# Altium PCB 110-00315-D_B1-DevKit.PcbDoc (part 1 of 9)
Units mil, origin at the board's own origin, x right, y up, seen from the top; angles counter-clockwise.
Board outline 5199.57 x 2702 mil, 8 copper layers (Top Layer, Layer 2-GND-Plane, Layer 3, Layer 4, Layer 5, Layer 6, Layer 7-PWR-Plane, Bottom Layer), stack 60.866 mil thick; 418 components, 298 nets, 1591 pads, 1631 vias.
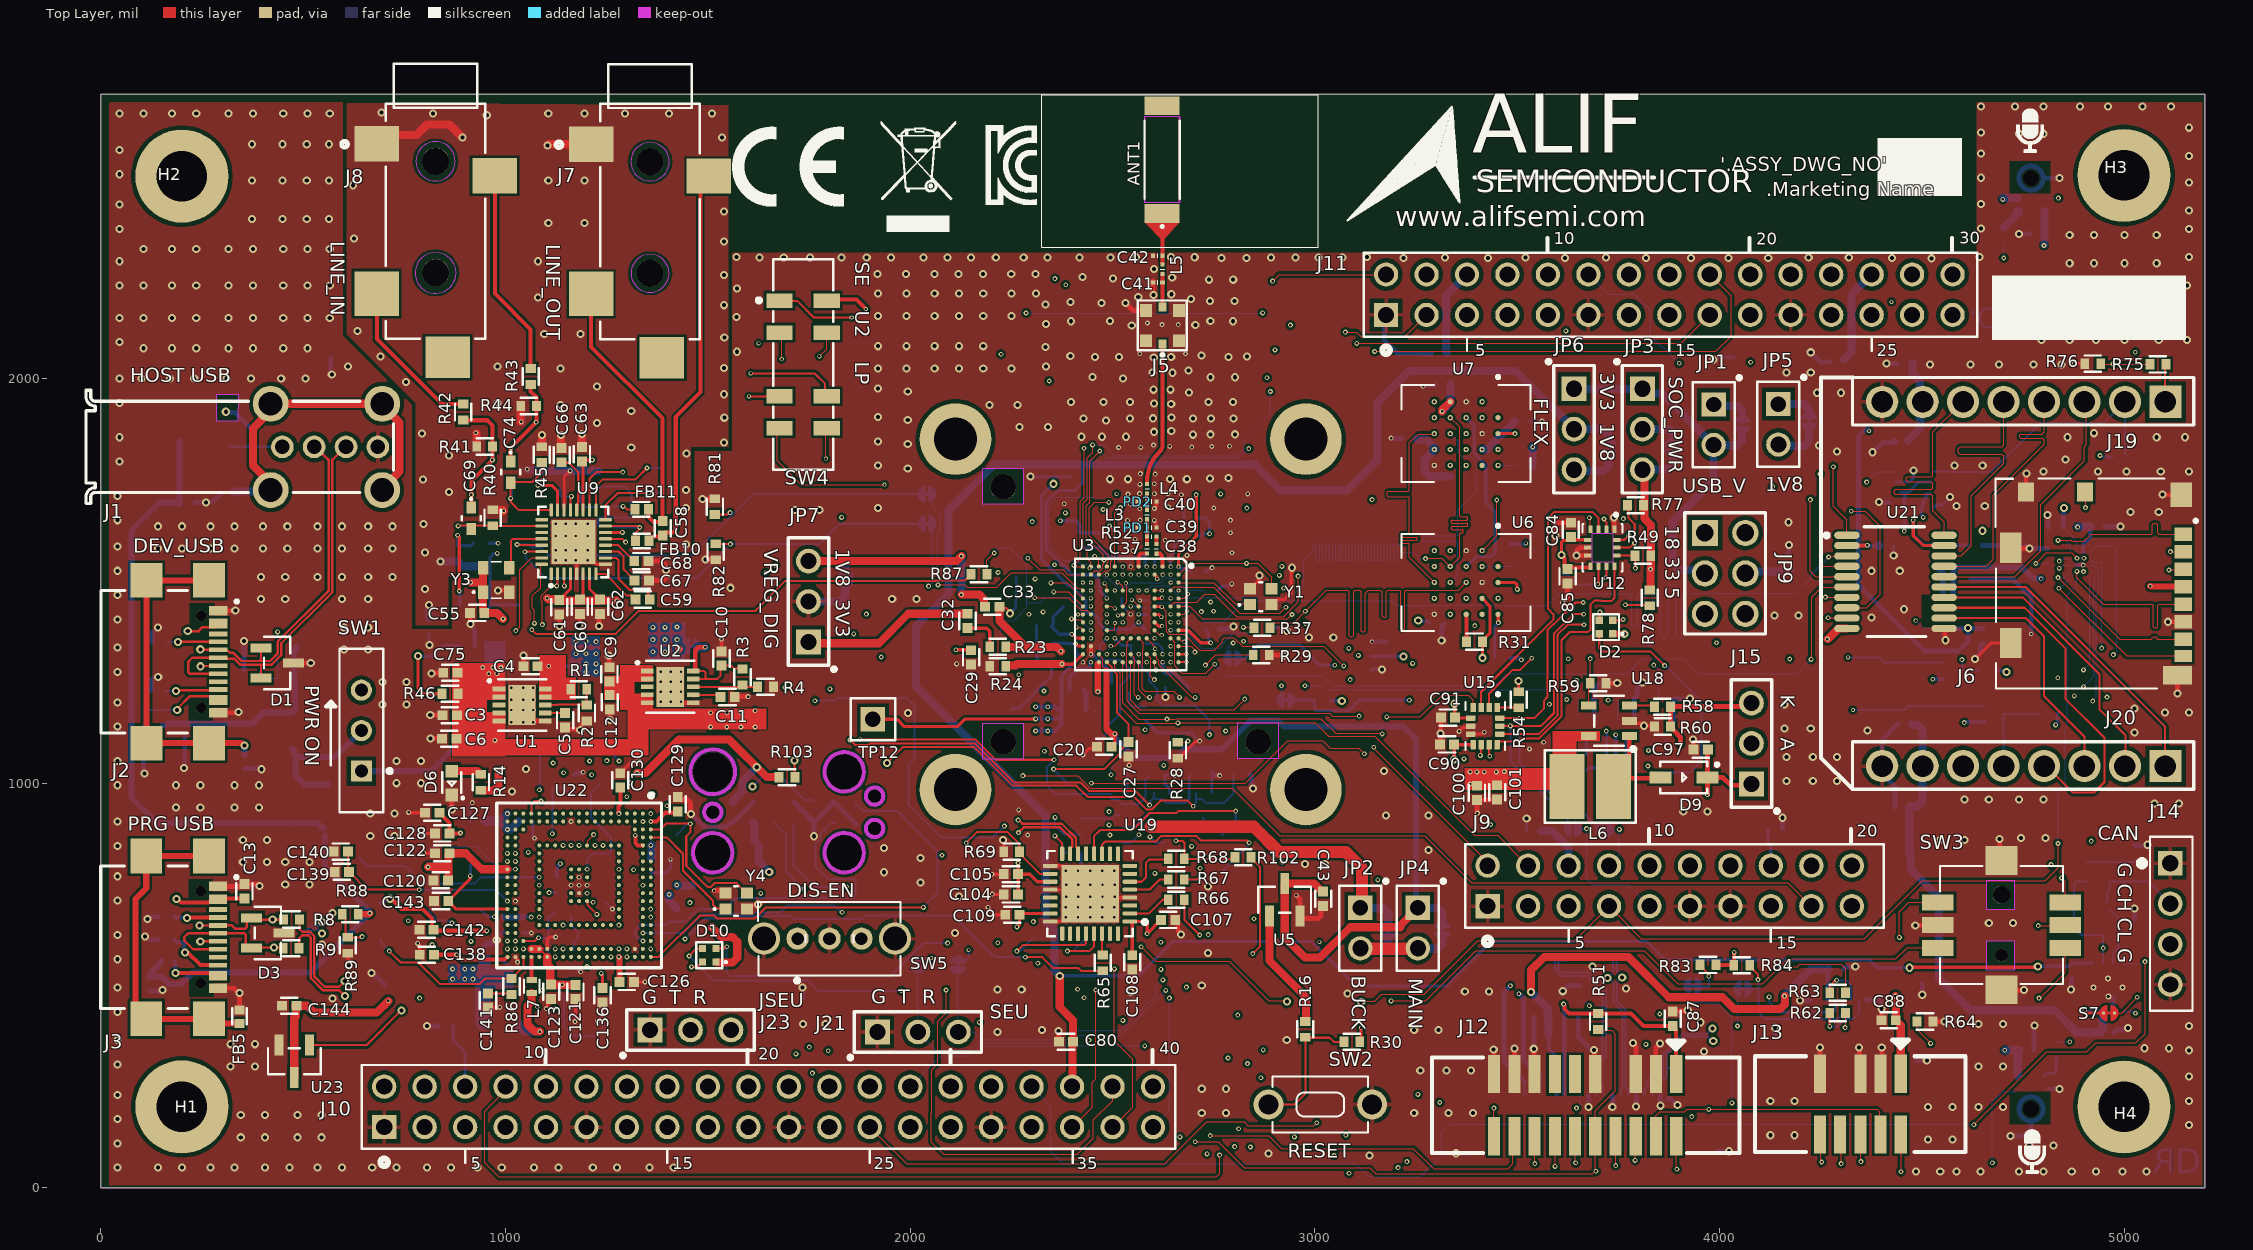
[diagram p0: Top Layer view]
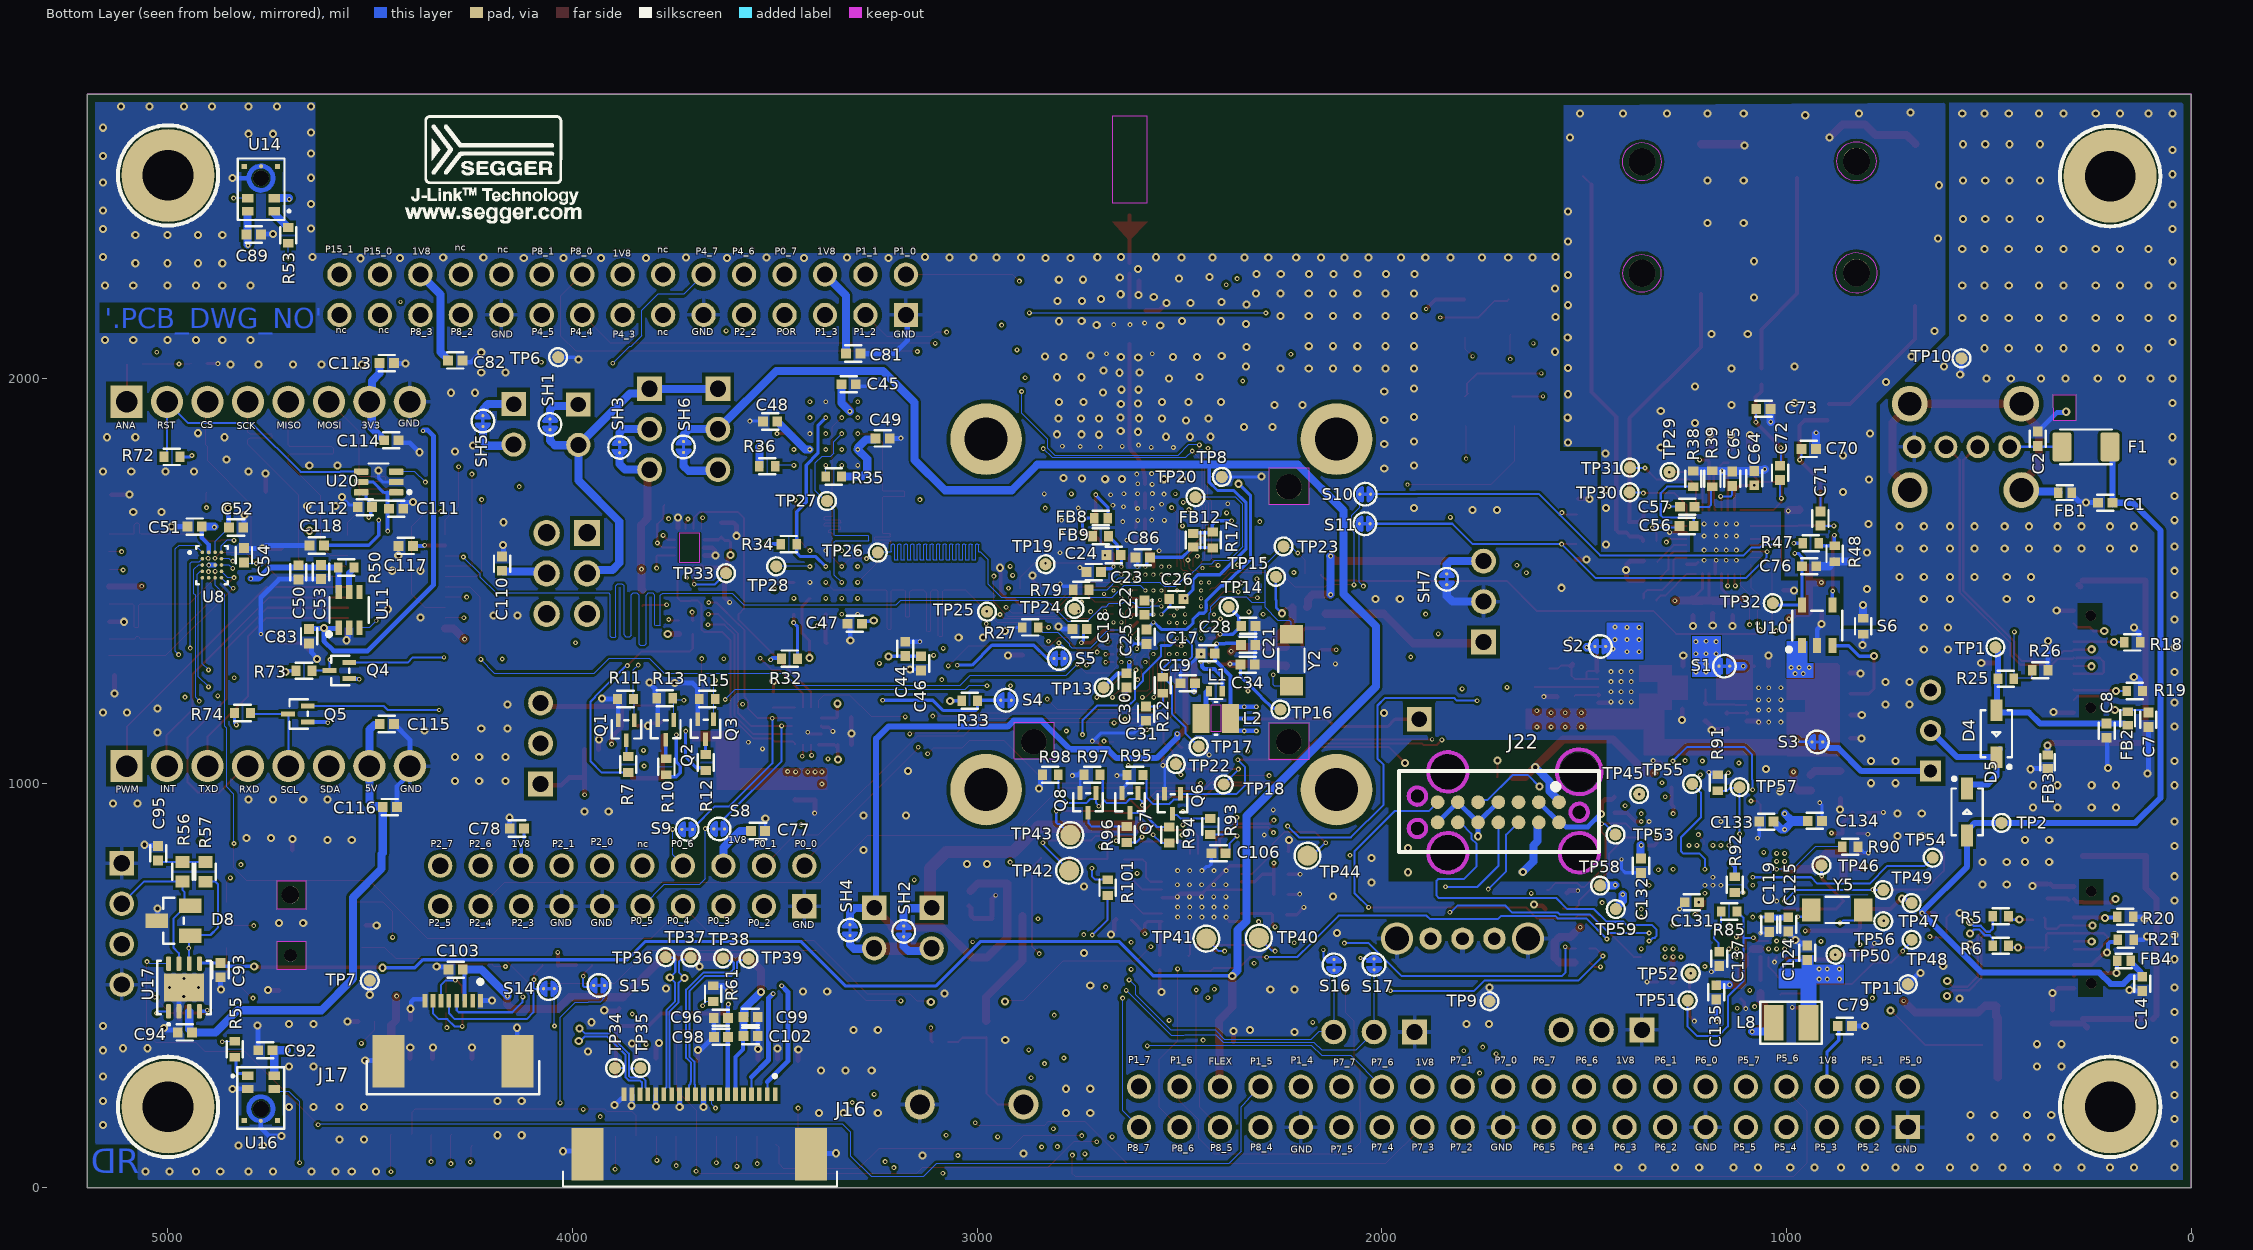
[diagram p1: Bottom Layer view, seen from below]
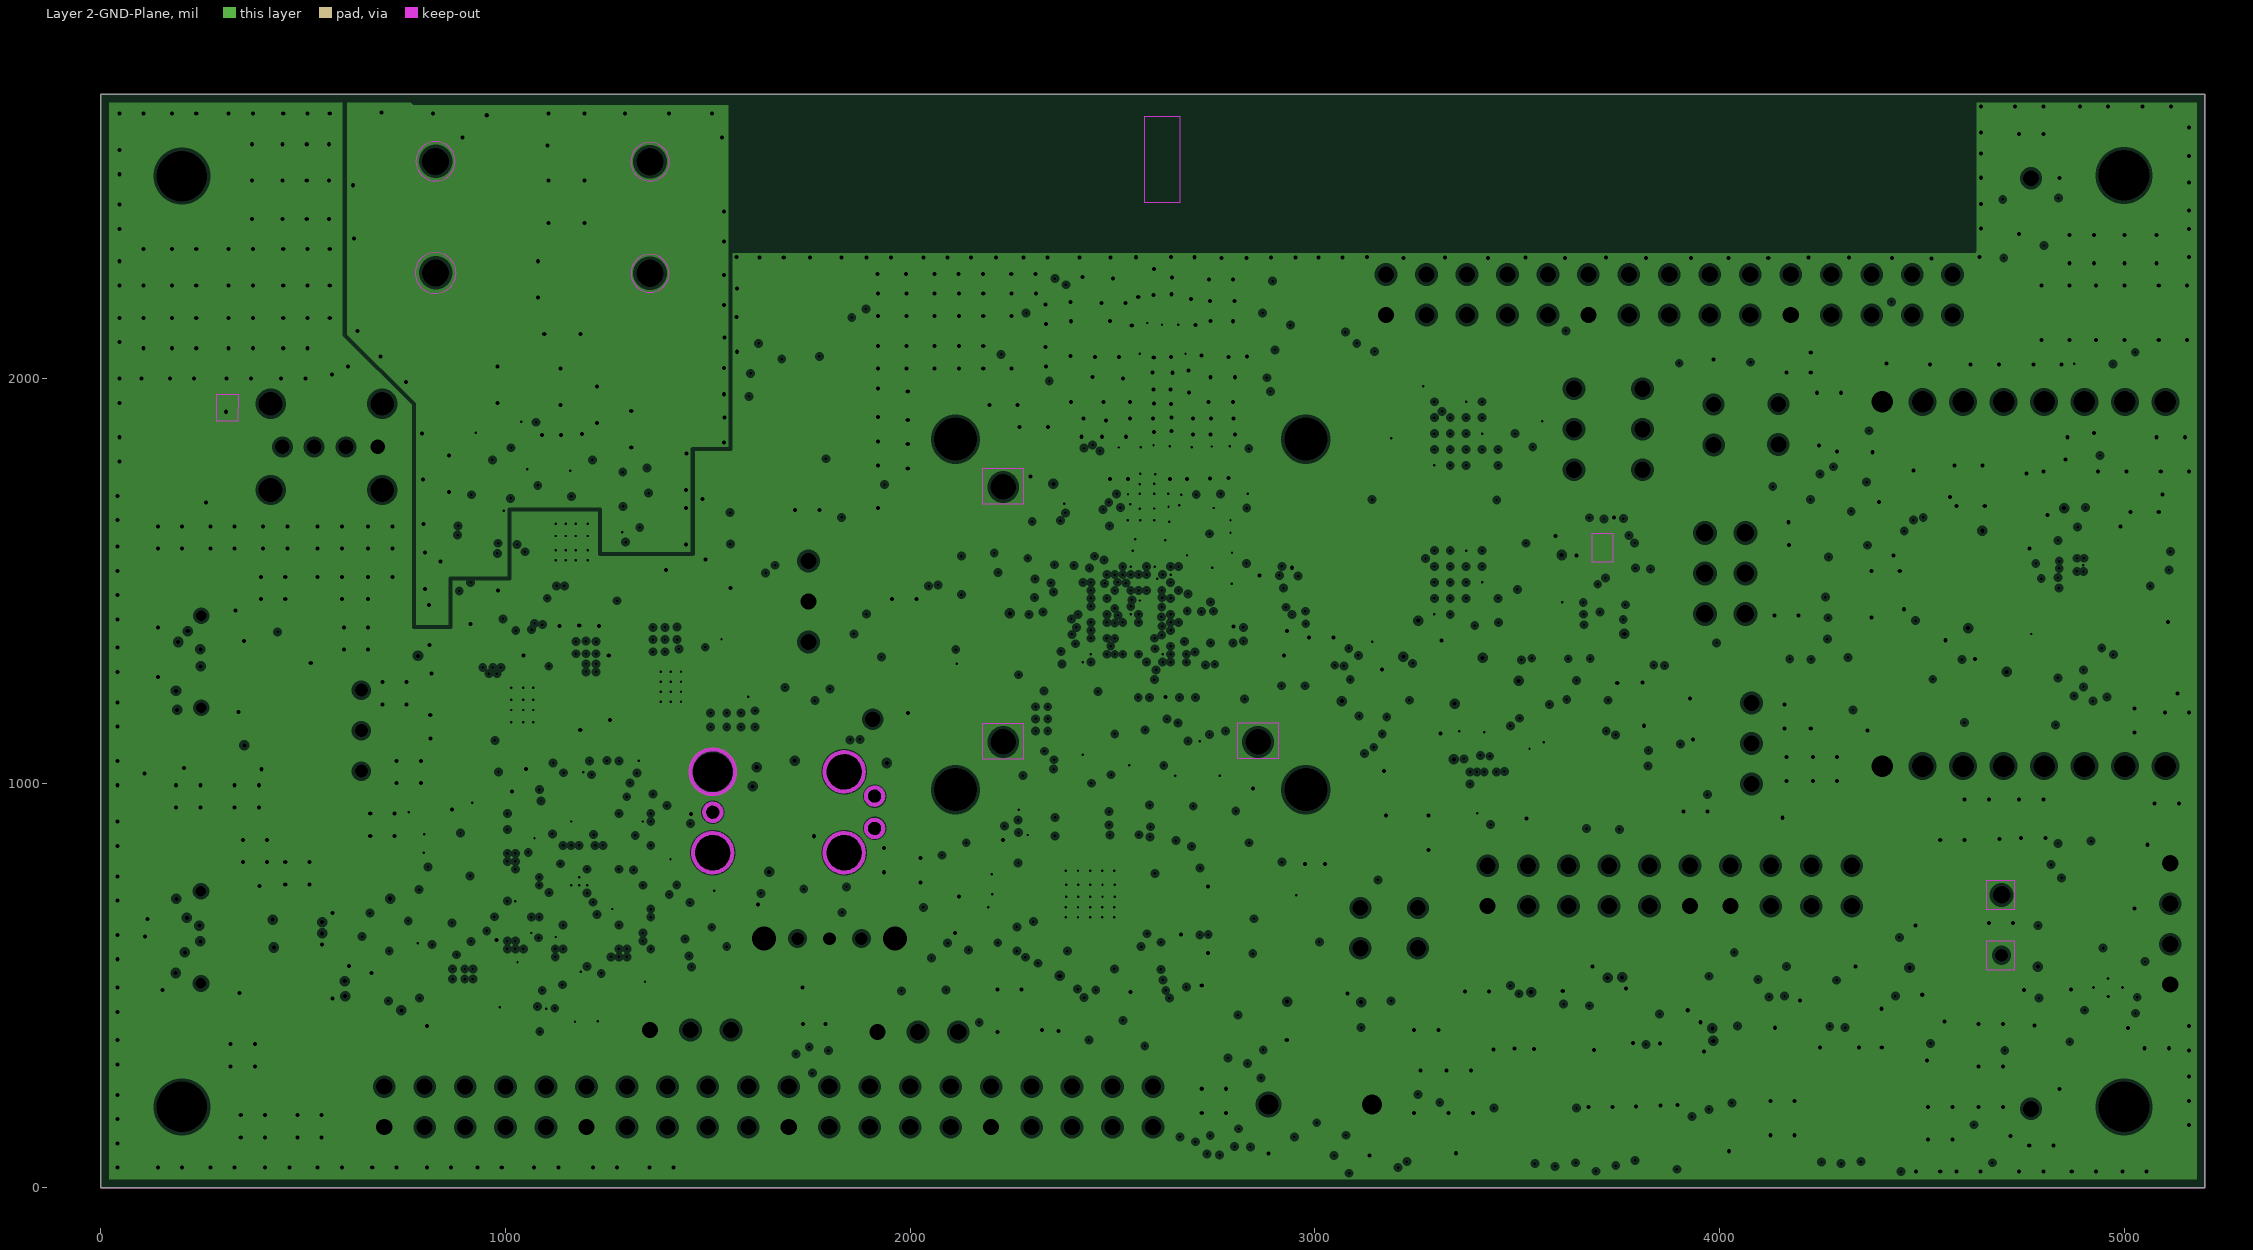
[diagram p2: Layer 2-GND-Plane, clearances drawn from the general rule]
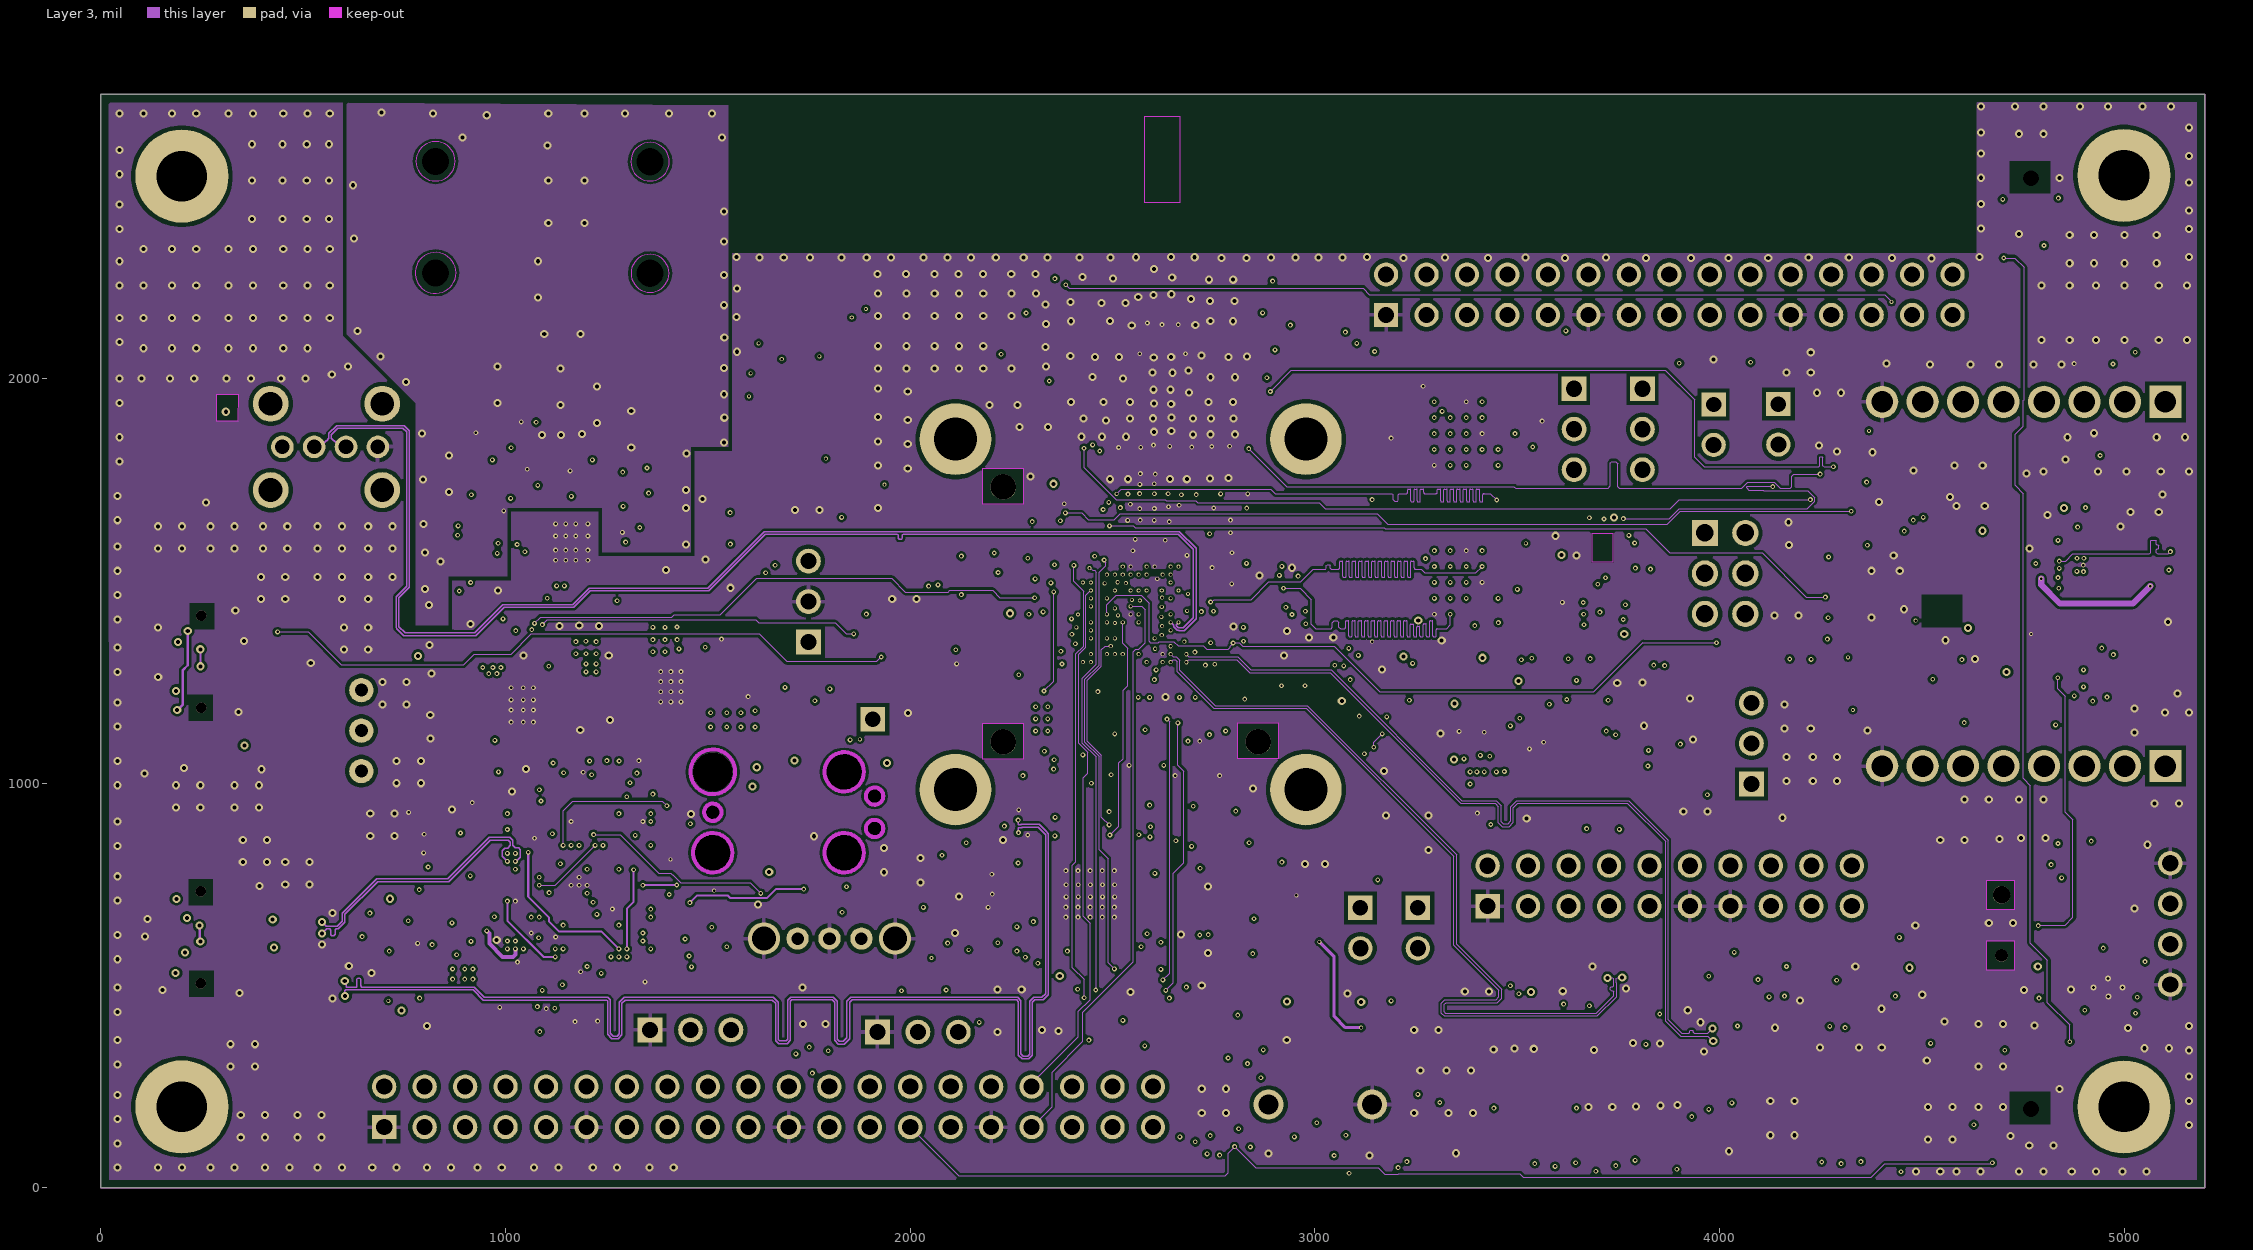
[diagram p3: Layer 3]
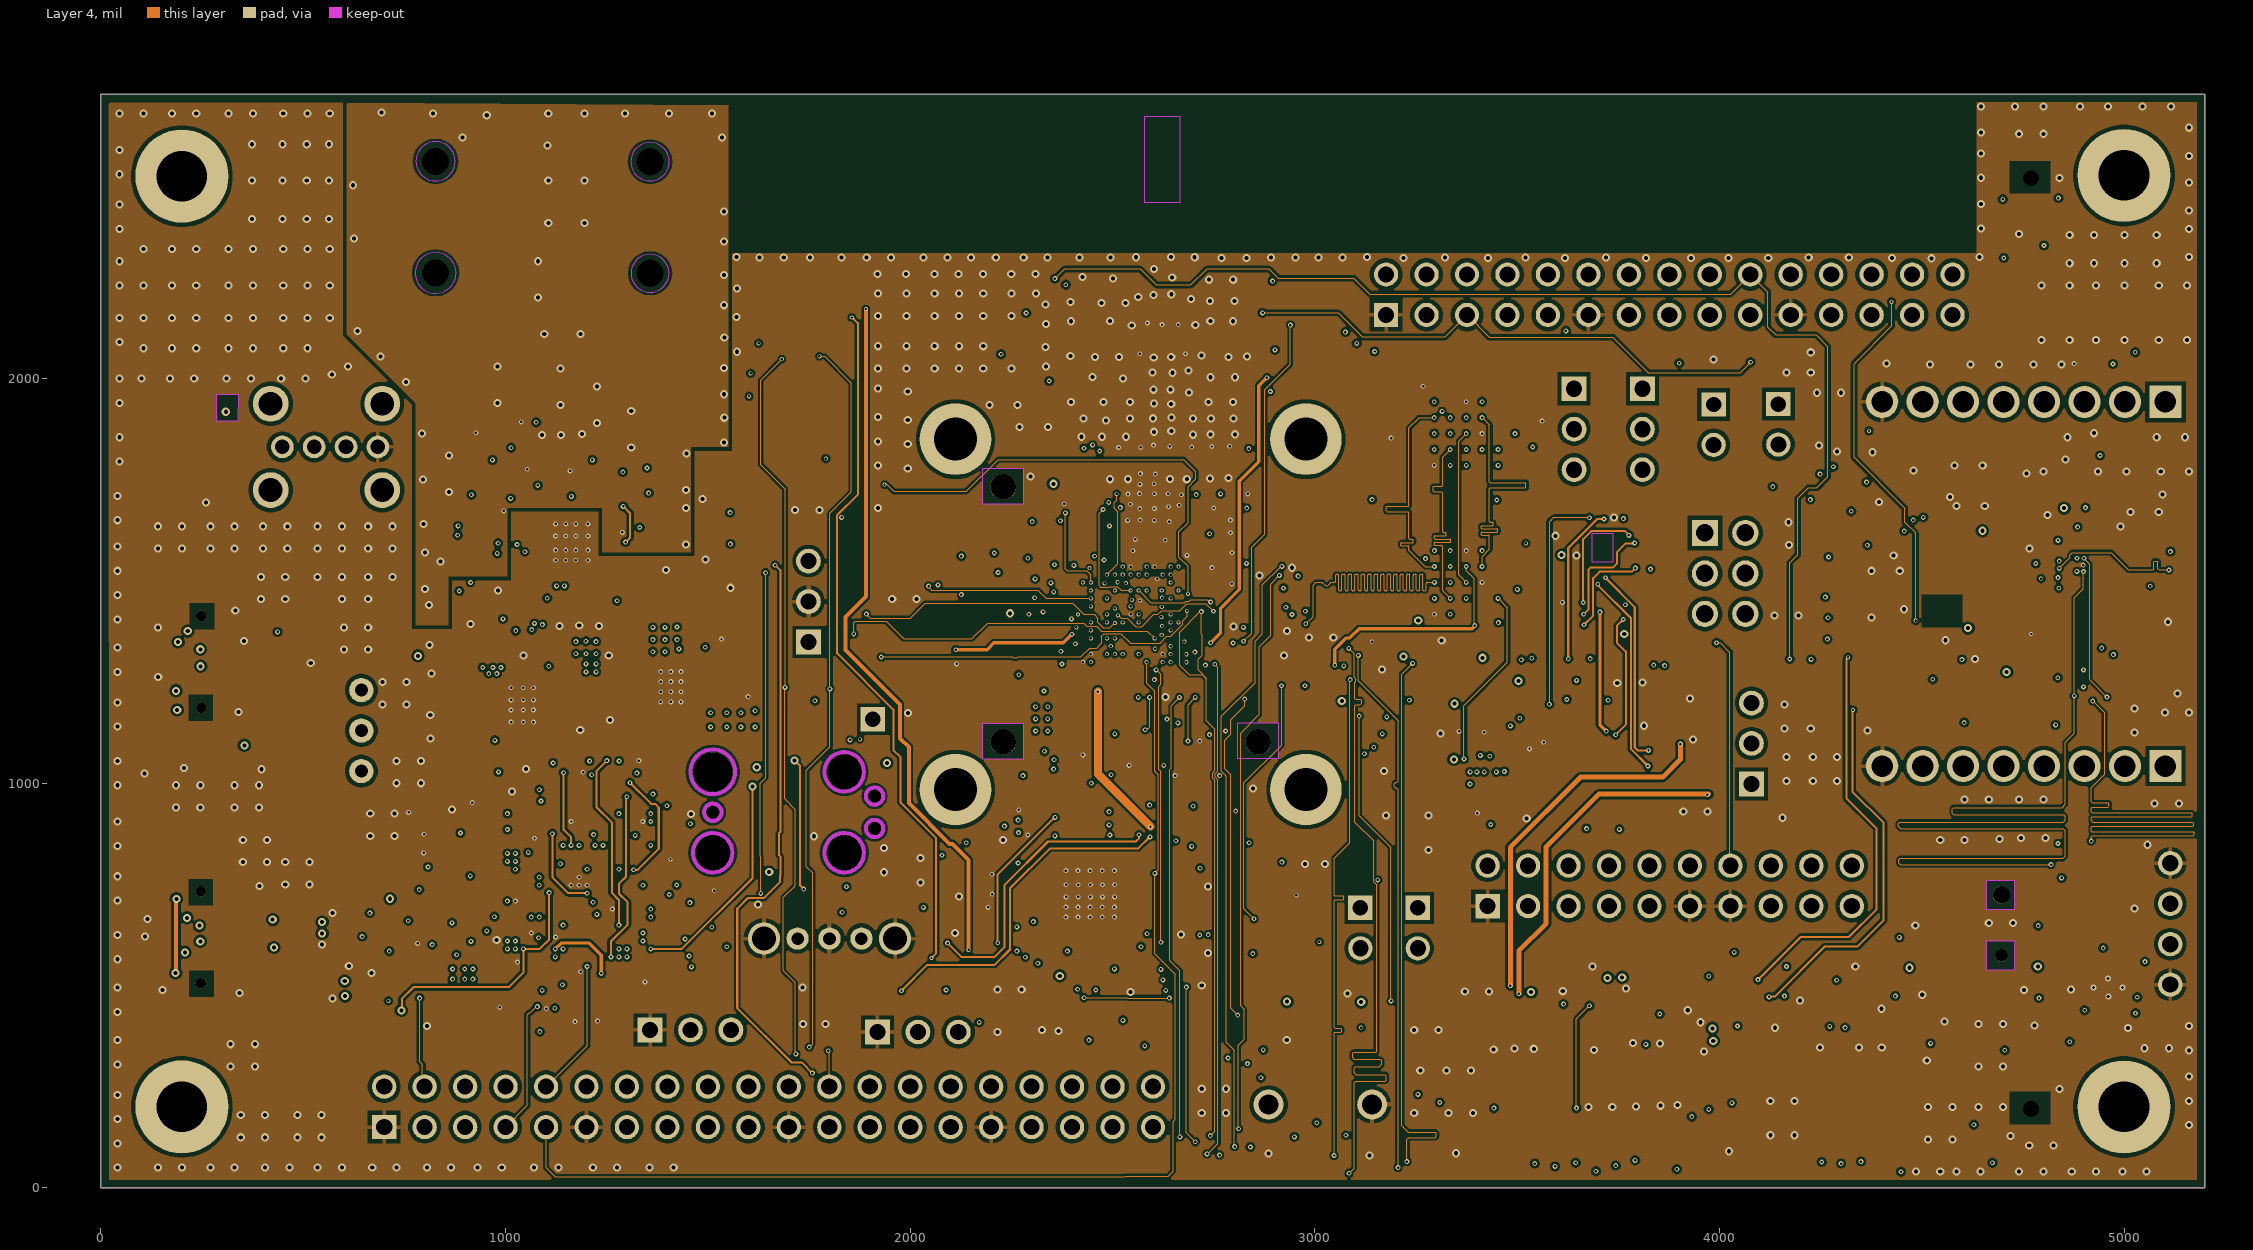
[diagram p4: Layer 4]
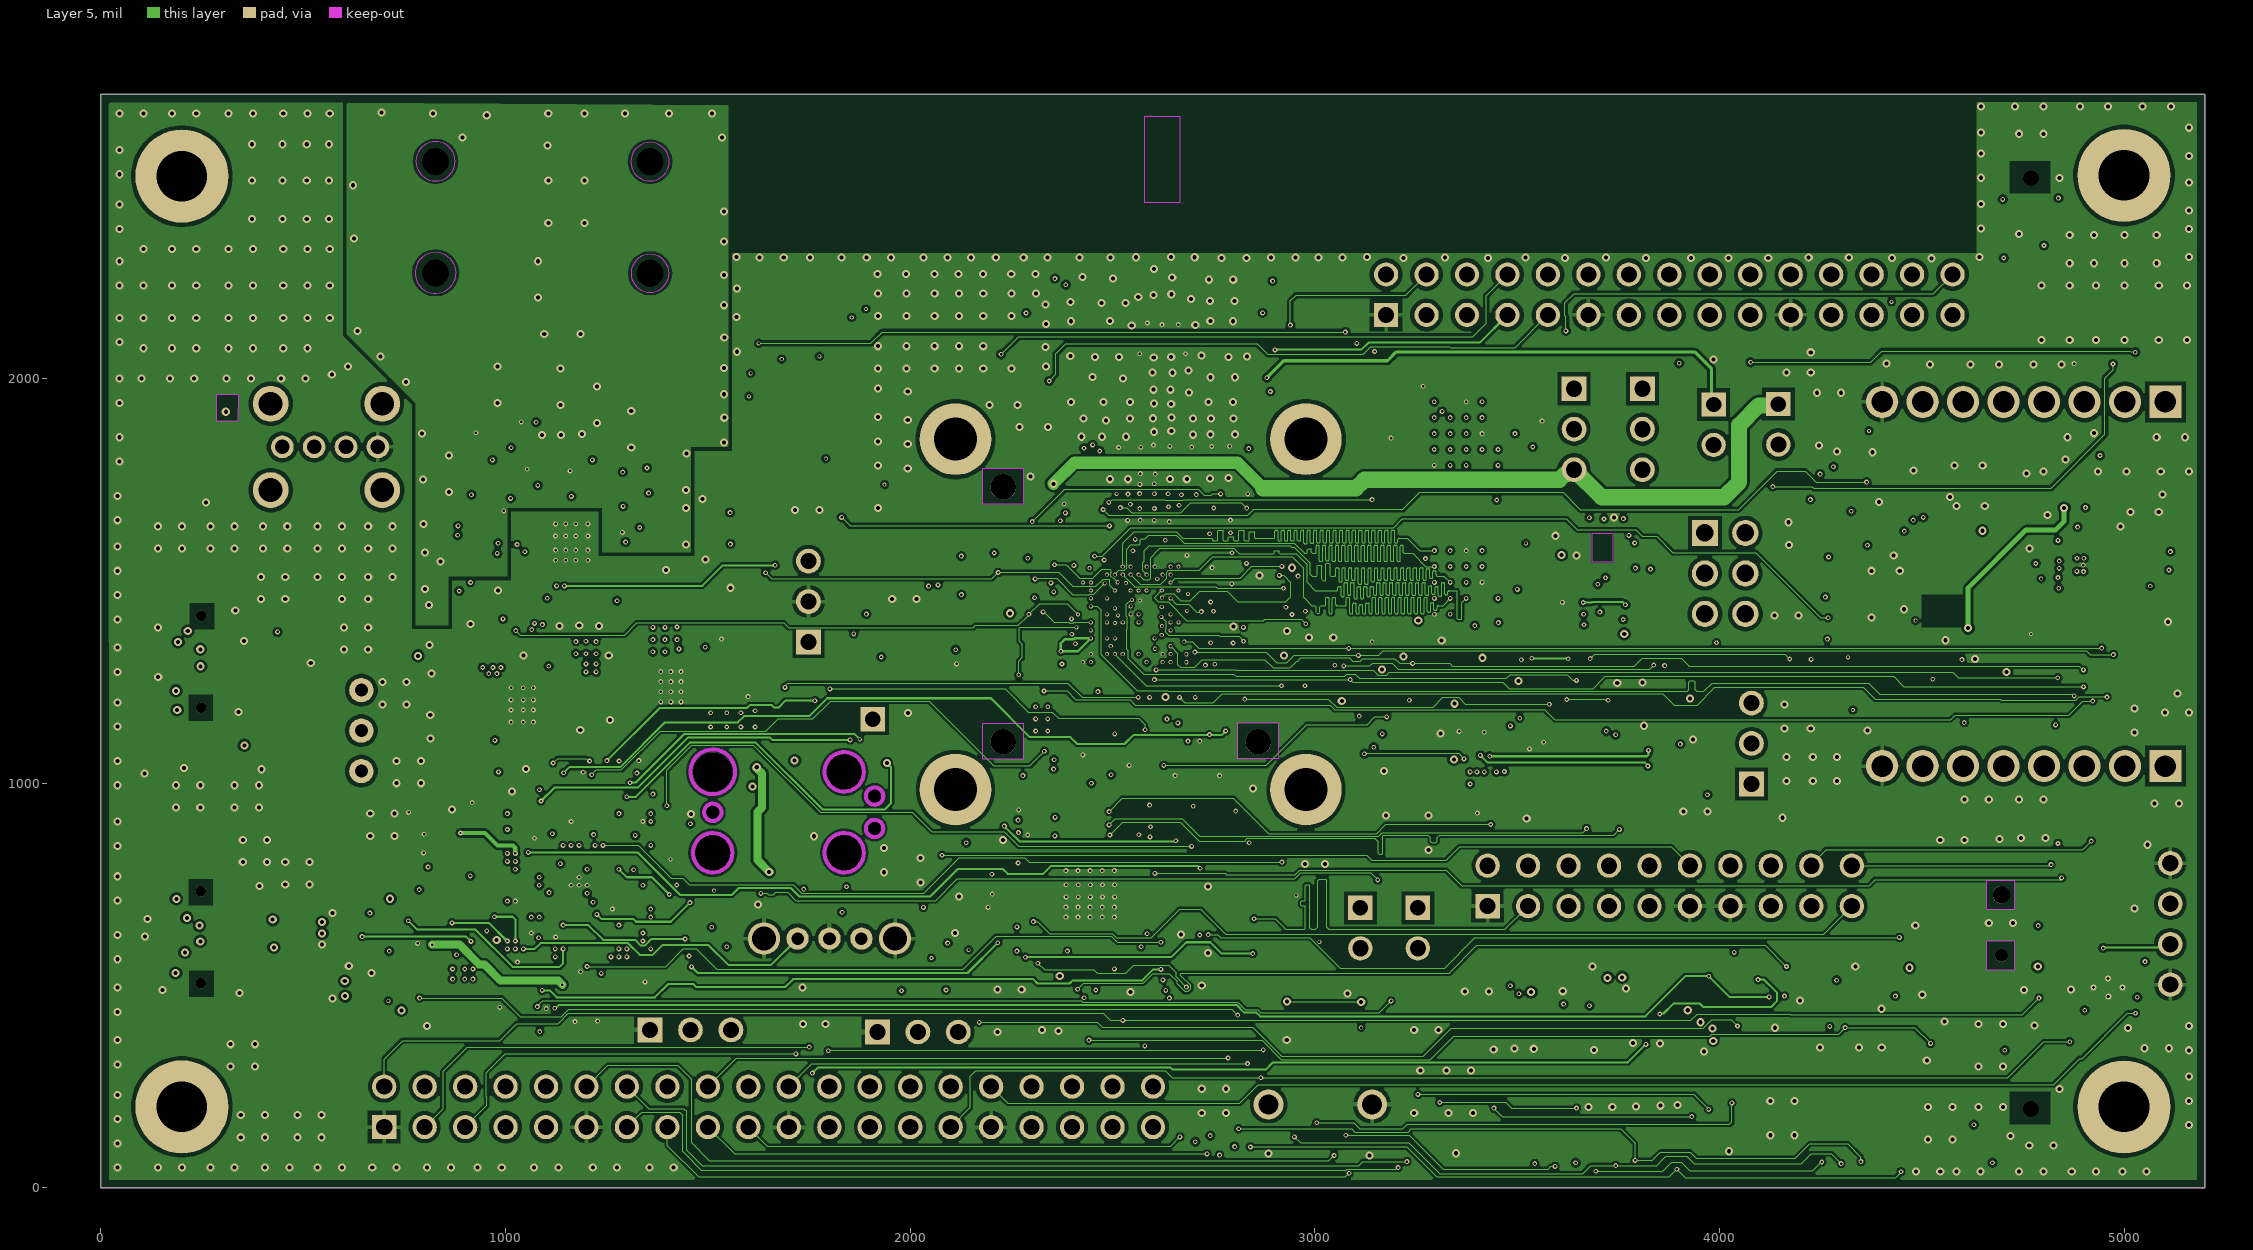
[diagram p5: Layer 5]
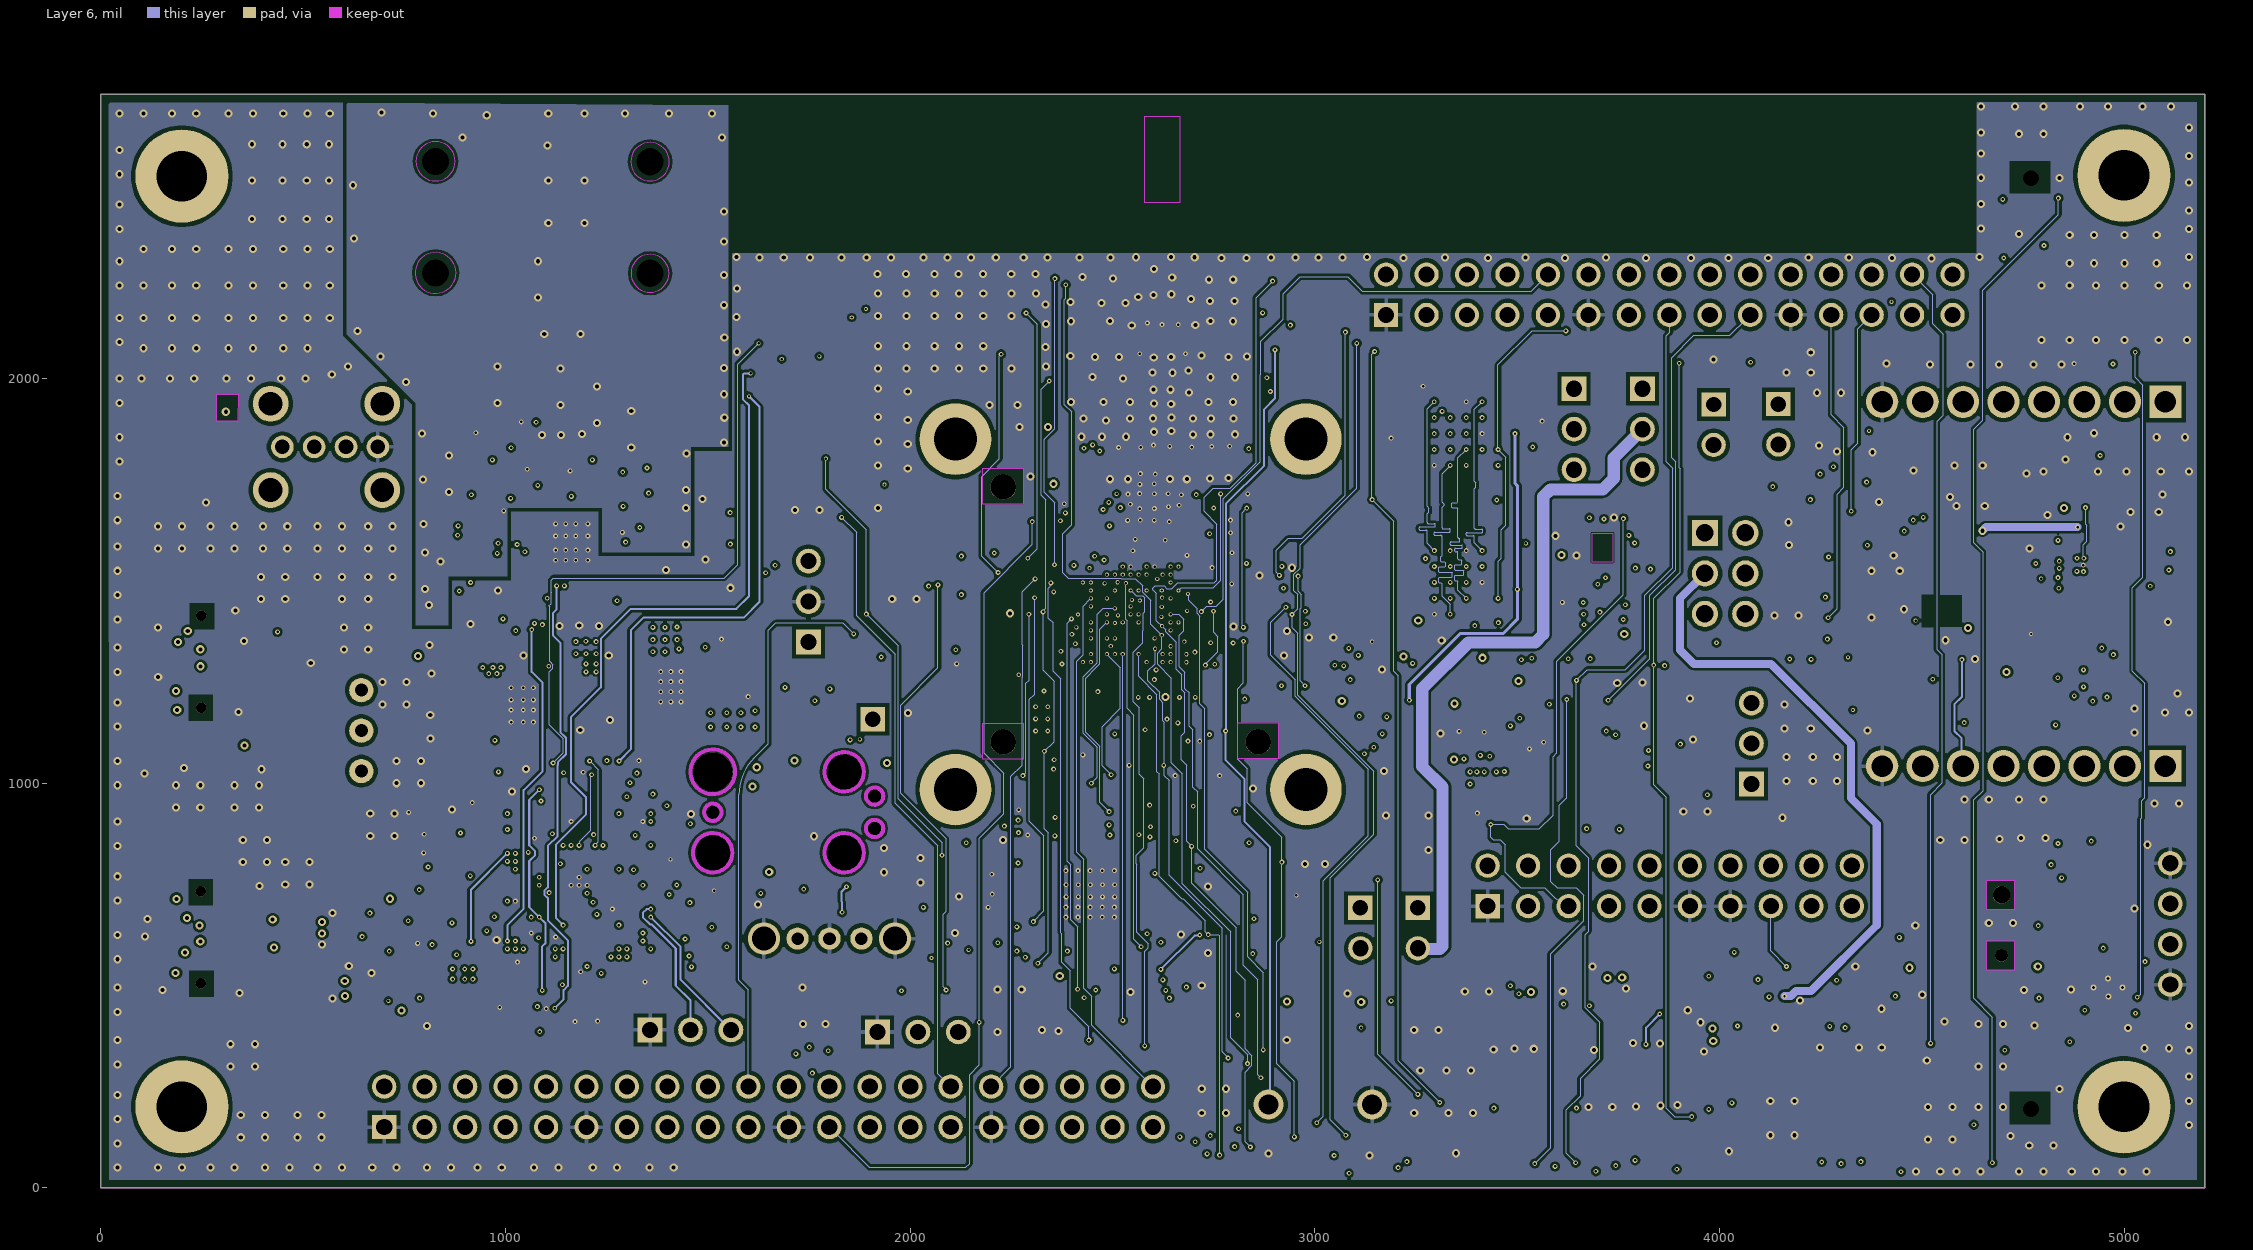
[diagram p6: Layer 6]
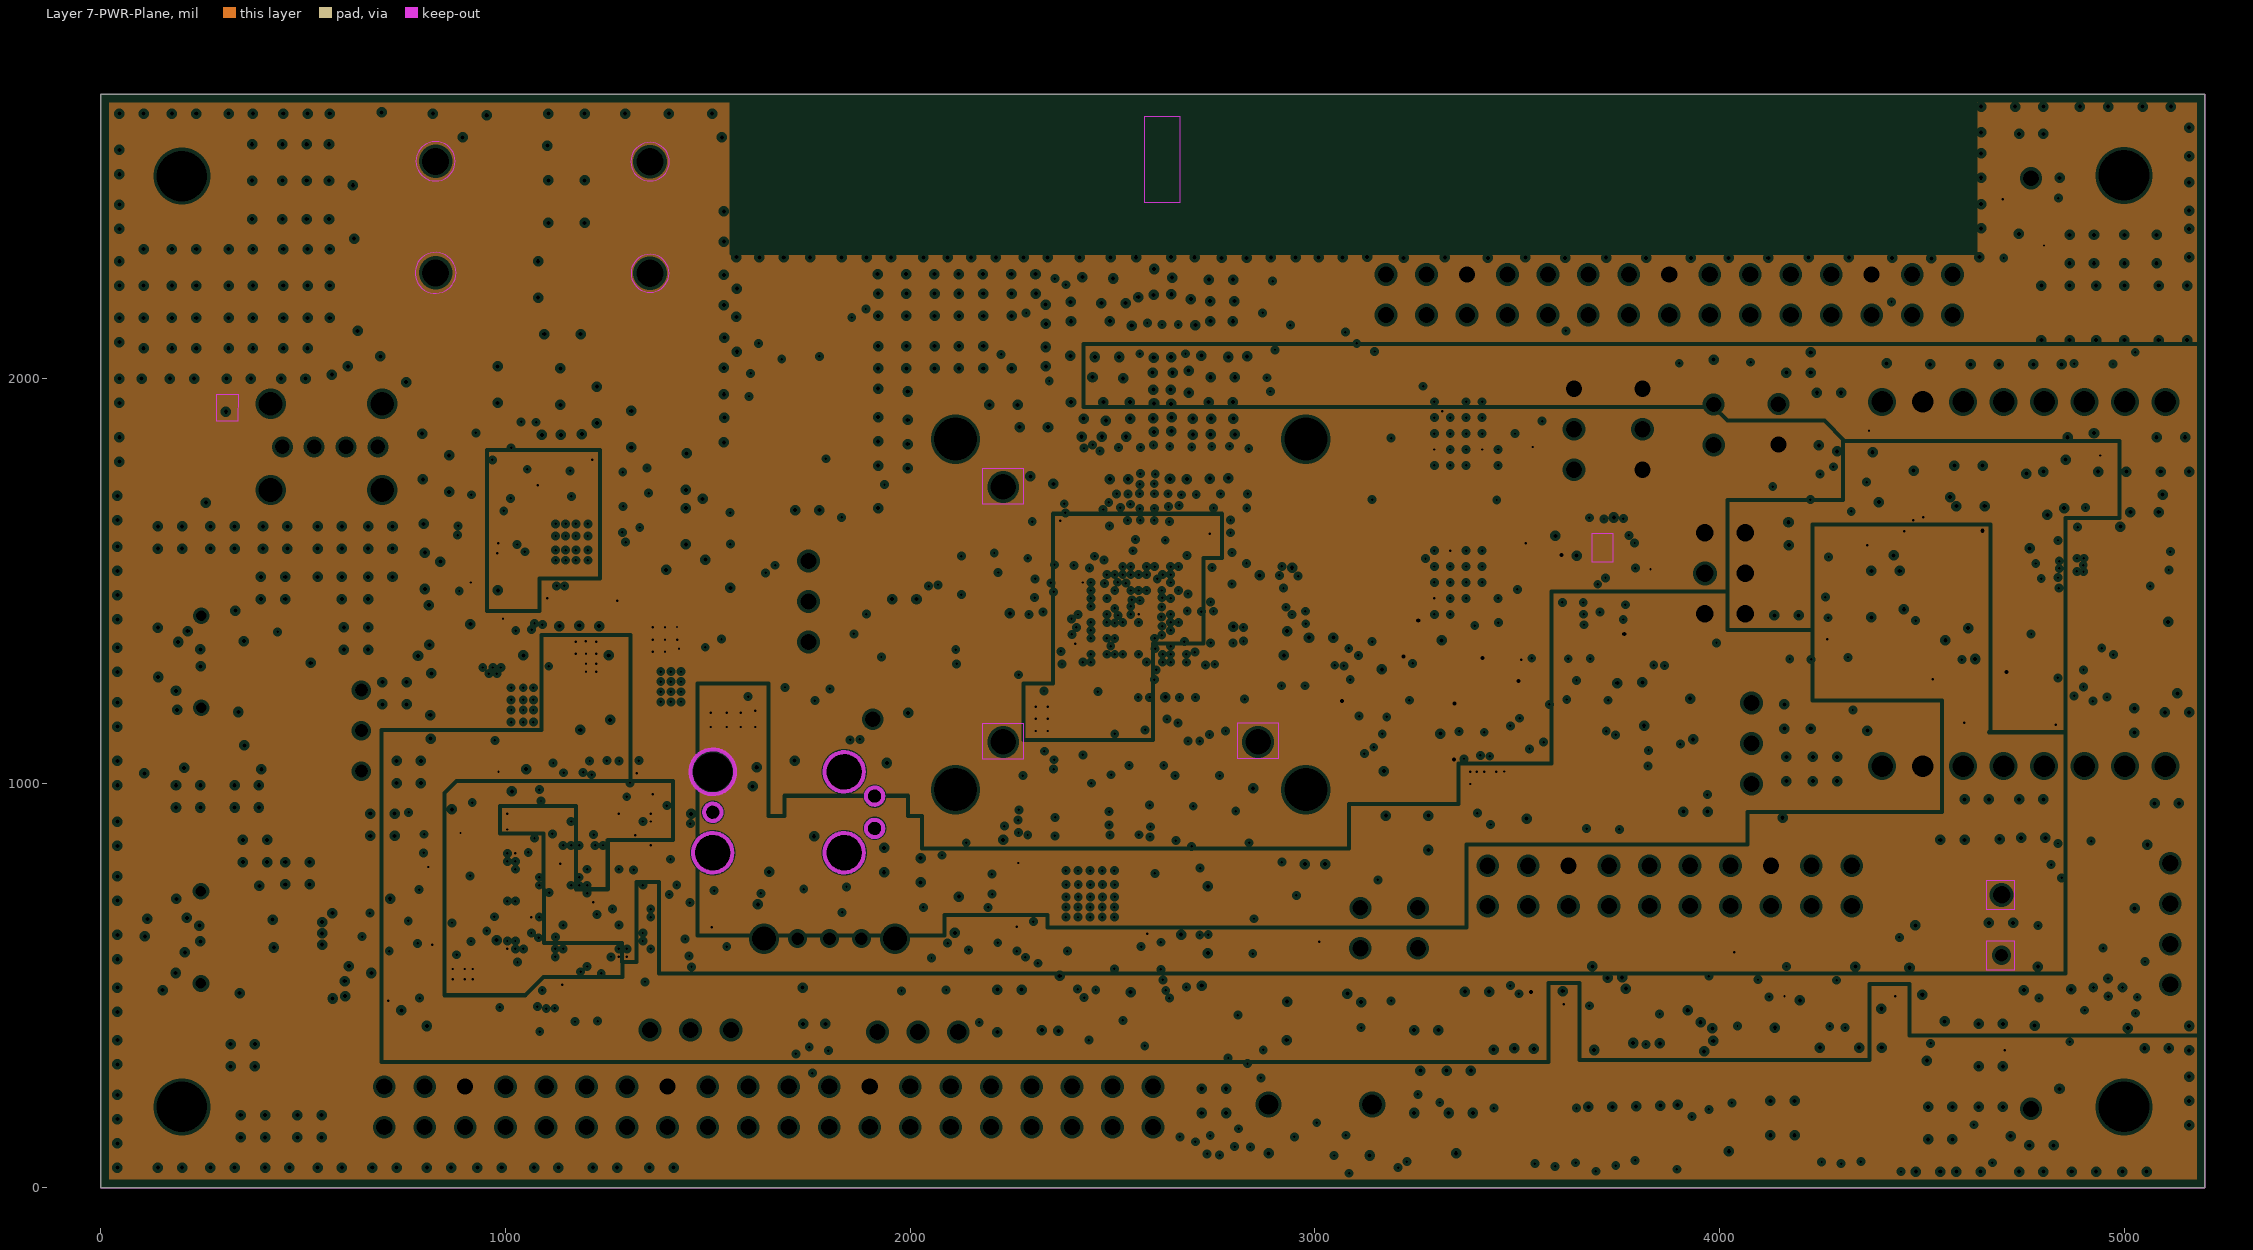
[diagram p7: Layer 7-PWR-Plane, clearances drawn from the general rule]

## Layer stack, top to bottom
Top Solder: solder mask 1, SM-003, Dk 4
Top Layer: signal copper 1.378
Dielectric 1: prepreg 6, PP-006, Dk 4.2
Layer 2-GND-Plane: plane copper 0.685, net (Multiple Nets)
Dielectric 2: prepreg 6, PP-006, Dk 4.2
Layer 3: signal copper 0.685
Dielectric 6: prepreg 6, PP-006, Dk 4.2
Layer 4: signal copper 0.685
Dielectric 3: dielectric 18, FR-4, Dk 4.2
Layer 5: signal copper 0.685
Dielectric 7: prepreg 6, PP-006, Dk 4.2
Layer 6: signal copper 0.685
Dielectric 4: prepreg 6, PP-006, Dk 4.2
Layer 7-PWR-Plane: plane copper 0.685, net (Multiple Nets)
Dielectric 5: prepreg 6, PP-006, Dk 4.2
Bottom Layer: signal copper 1.378
Bottom Solder: solder mask 1, SM-003, Dk 4

## Board outline
0,0 5199.58,0 5199.58,2702 0,2702

## Design rules (kind name [scope] priority, off if disabled: settings)
Clearance [All] p1: gap=3 ignorepadtopadclearanceinfootprint=TRUE except(0: Arc-Hole Track-Hole SMDPad-Hole THPad-Hole Via-Hole Fill-Hole Poly-Hole Region-Region Region-Hole Text-Hole; 2: Arc-Text Track-Text SMDPad-Text THPad-Text Via-Text Fill-Text Poly-Text Region-Text Text-Text; 6: Arc-Poly Track-Poly SMDPad-Poly Via-Poly Fill-Poly Poly-Poly; 10: THPad-Poly)
ComponentClearance [All] p1: gap=5 collisioncheckmode=3 verticalgap=10 showdistances=FALSE
DiffPairsRouting DiffPairsRouting100 [InDifferentialPairClass('MIPI')] p1: maxlimit=10 minlimit=3 mostfreqgap=10 toplayer_maxgap=3 toplayer_prefgap=3 toplayer_minwidth=5 toplayer_maxwidth=5 toplayer_prefwidth=5 midlayer1_mingap=4 midlayer1_maxgap=4 midlayer1_prefgap=4 midlayer1_minwidth=3 midlayer1_maxwidth=3 midlayer1_prefwidth=3 midlayer2_mingap=4 midlayer2_maxgap=4 midlayer2_prefgap=4 midlayer2_minwidth=3 midlayer2_maxwidth=3 midlayer2_prefwidth=3 midlayer3_mingap=10 midlayer3_minwidth=15 midlayer3_maxwidth=15 midlayer3_prefwidth=15 midlayer4_mingap=10 midlayer4_minwidth=15 midlayer4_maxwidth=15 midlayer4_prefwidth=15 bottomlayer_maxgap=3 bottomlayer_prefgap=3 bottomlayer_minwidth=5 bottomlayer_maxwidth=5 bottomlayer_prefwidth=5 maxuncoupledlength=500
DiffPairsRouting DiffPairsRouting90 [InDifferentialPairClass('USB')] p2: maxlimit=10 minlimit=3 mostfreqgap=10 toplayer_maxgap=3 toplayer_prefgap=3 toplayer_minwidth=6 toplayer_maxwidth=6 toplayer_prefwidth=6 midlayer1_maxgap=3 midlayer1_prefgap=3 midlayer1_minwidth=3.5 midlayer1_maxwidth=3.5 midlayer1_prefwidth=3.5 midlayer2_maxgap=3 midlayer2_prefgap=3 midlayer2_minwidth=3.5 midlayer2_maxwidth=3.5 midlayer2_prefwidth=3.5 midlayer3_mingap=10 midlayer3_minwidth=15 midlayer3_maxwidth=15 midlayer3_prefwidth=15 midlayer4_mingap=10 midlayer4_minwidth=15 midlayer4_maxwidth=15 midlayer4_prefwidth=15 bottomlayer_maxgap=3 bottomlayer_prefgap=3 bottomlayer_minwidth=6 bottomlayer_maxwidth=6 bottomlayer_prefwidth=6 maxuncoupledlength=500 // 90 ohms, 6/12mil height
HoleSize [All] p1: absolutevalues=TRUE maxlimit=500 minlimit=1 maxpercent=80.000 minpercent=20.000
Length Length-HEX-SPI0 [InNetClass('HEX-SPI0')] p1: maxlimit=2690 minlimit=0
MatchedLengths HEXSPI0 [InNetClass('HEX-SPI0')] p1: tolerance=5 checknetsindiffpair=FALSE checkdiffpairvsdiffpair=TRUE checkxsignals=TRUE checkothers=TRUE
MinimumSolderMaskSliver [All] p1: minsoldermaskwidth=0
PlaneClearance [All] p1: clearance=8
PlaneConnect [All] p1: pad.planeconnectstyle=Relief pad.reliefexpansion=20 pad.reliefentries=4 pad.reliefconductorwidth=5 pad.reliefairgap=5 via.planeconnectstyle=Direct via.reliefexpansion=20 via.reliefentries=4 via.reliefconductorwidth=5 via.reliefairgap=5
PolygonConnect PolygonConnect_1 [All] p1: thpad.connectstyle=Relief thpad.reliefconductorwidth=10 thpad.reliefentries=4 thpad.polygonreliefangle="90 Angle" thpad.airgapwidth=10 smdpad.connectstyle=Direct smdpad.reliefconductorwidth=10 smdpad.reliefentries=4 smdpad.polygonreliefangle="90 Angle" smdpad.airgapwidth=10 via.connectstyle=Direct via.reliefconductorwidth=10 via.reliefentries=4 via.polygonreliefangle="90 Angle" via.airgapwidth=10
RoutingVias [All] p1: holewidth=10 width=20 viastyle="Through Hole" minholewidth=6 minwidth=10 maxholewidth=24 maxwidth=35
SilkToSilkClearance [All] p1: silktosilkclearance=1
SilkToSolderMaskClearance [IsPad] p1: minsilkscreentomaskgap=0 clearancetoexposedcopper=TRUE
SolderMaskExpansion [All] p1: expansion=4 istentingtop=FALSE
SupplyNets "Schematic Supply Nets_2" [InNet('VDD_MAIN')] p1: voltage=0.000
SupplyNets "Schematic Supply Nets_13" [InNet('VDD_CORE_0V8')] p2: voltage=0.000
SupplyNets "Schematic Supply Nets_12" [InNet('V_1V8_C')] p3: voltage=0.000
SupplyNets "Schematic Supply Nets_11" [InNet('GND')] p4: voltage=0.000
SupplyNets "Schematic Supply Nets_9" [InNet('V_3V3')] p5: voltage=0.000
SupplyNets "Schematic Supply Nets_8" [InNet('AG')] p6: voltage=0.000
SupplyNets "Schematic Supply Nets_7" [InNet('USB_U_VBUS')] p7: voltage=0.000
SupplyNets "Schematic Supply Nets_6" [InNet('V_CON_IO')] p8: voltage=0.000
SupplyNets "Schematic Supply Nets_4" [InNet('V_1V8_R')] p9: voltage=0.000
SupplyNets "Schematic Supply Nets_3" [InNet('VIN_RAW')] p10: voltage=0.000
SupplyNets "Schematic Supply Nets_1" [InNet('USB_D_VBUS')] p11: voltage=0.000
SupplyNets "Schematic Supply Nets" [InNet('VDD_IO_FLEX')] p12: voltage=0.000
Width [All] p1: maxlimit=40 minlimit=3 preferedwidth=5 minimp=50.000000 maximp=50.000000 favimp=50.000000
22 further rules are at their usual default settings.

## Classes and differential pairs
net class ck: CK_CS CK_MISO CK_MOSI CK_SCK
differential pair class USB_: USB_FTDI
differential pair class USB_DEV_: USB_DEV
differential pair class USB_CYP_: USB_CYP
differential pair class MIPI_DSI_C_: MIPI_DSI_C
differential pair class MIPI_DSI_0_: MIPI_DSI_0
component class 14-Cypress: C104 C105 C106 C107 C108 C109 R65 R66 R67 R68 R69 TP40 TP41 TP42 TP43 TP44 U19
component class 13-JLINK_2: D10 J21 J22 J23 Q6 Q7 Q8 R93 R94 R95 R96 R97 R98 R101 R102 R103 S16 S17 SW4 TP58 TP59
component class 12-JLINK_1: C119 C120 C121 C122 C123 C124 C125 C126 C127 C128 C129 C130 C131 C132 C133 C134 C135 C136 C137 C138 C139 C140 C141 C142 C143 C144 L7 L8 R85 R86 R87 R88 R89 R90 R91 R92 SW5 TP45 TP46 TP47 TP48 TP49 TP50 TP51 TP52 TP53 TP54 TP55 TP56 TP57 U22 U23 Y4 Y5
component class 11-CPU_GPIO: R77 R78 R81 R82 R83 R84 S8 S9 S10 S11 S14 S15
component class 10-Click: C110 C111 C112 C113 C114 C115 C116 C117 C118 J19 J20 JP9 Q4 Q5 R72 R73 R74 R75 R76 SW3 U20 U21
component class 9-MIPI: C96 C97 C98 C99 C100 C101 C102 C103 D9 J15 J16 J17 L6 R58 R59 R60 R61 R62 R63 R64 TP34 TP35 TP36 TP37 TP38 TP39 U18
component class 8-SensorsAndJTAG: C84 C85 C87 C88 C89 C90 C91 C92 C93 C94 C95 D8 J12 J13 J14 R49 R51 R53 R54 R55 R56 R57 S7 TP33 U12 U14 U15 U16 U17
component class 7-IO_Headers: C77 C78 C79 C80 C81 C82 J9 J10 J11
component class 6-CODEC: C55 C56 C57 C58 C59 C60 C61 C62 C63 C64 C65 C66 C67 C68 C69 C70 C71 C72 C73 C74 C75 C76 FB10 FB11 J7 J8 R38 R39 R40 R41 R42 R43 R44 R45 R46 R47 R48 S6 TP29 TP30 TP31 TP32 U9 U10 Y3
component class 5-Memory: C44 C45 C46 C47 C48 C49 C50 C51 C52 C53 C54 C83 J6 R31 R32 R33 R34 R35 R36 R37 R50 S4 S5 TP25 TP26 TP27 TP28 U6 U7 U8 U11
component class 4-CPUMipiXo: ANT1 C37 C38 C39 C40 C41 C42 C43 J5 L3 L4 L5 PD1 PD2 R16 R29 R30 R52 R79 SW2 TP19 TP20 TP22 TP23 TP24 U5 Y1 Y2
component class 3-CPUPower: C17 C18 C19 C20 C21 C22 C23 C24 C25 C26 C27 C28 C29 C30 C31 C32 C33 C34 C86 FB8 FB9 FB12 JP1 JP2 JP3 JP4 JP5 JP6 JP7 L1 L2 R17 R22 R23 R24 R25 R26 R27 R28 SH1 SH2 SH3 SH4 SH5 SH6 SH7 TP12 TP13 TP14 TP15 TP16 TP17 TP18 U3
component class 2-PowerInput: C1 C2 C3 C4 C5 C6 C7 C8 C9 C10 C11 C12 C13 C14 D1 D2 D3 D4 D5 D6 F1 FB1 FB2 FB3 FB4 FB5 H1 H2 H3 H4 J1 J2 J3 Q1 Q2 Q3 R1 R2 R3 R4 R5 R6 R7 R8 R9 R10 R11 R12 R13 R14 R15 R18 R19 R20 R21 S1 S2 S3 SW1 TP1 TP2 TP6 TP7 TP8 TP9 TP10 TP11 U1 U2
differential pair USB_FTDI: +USB_FTDI_P -USB_FTDI_N
differential pair USB_DEV: +USB_DEV_P -USB_DEV_N
differential pair USB_CYP: +USB_CYP_P -USB_CYP_N
differential pair MIPI_DSI_C: +MIPI_DSI_C_P -MIPI_DSI_C_N
differential pair MIPI_DSI_0: +MIPI_DSI_0_P -MIPI_DSI_0_N

## Components (designator, comment, footprint, x,y, rotation, side; value= is the part's Value field where it differs from the comment)
ANT1 "2450AT43A100" ANT_JOT_2450AT43A100_JOD 2622.58,2540.8 r90 top
C1 "Cap" CAPC0402-01 212,1693 r0 bottom value=1.0u
C2 "Cap" CAPC0402-01 379,1851 r270 bottom value=10n
C3 "Cap" CAPC0402-01 862.3,1167.8 r0 top value=1.0u
C4 "Cap" CAPC0402-01 1061.58,1288.8 r0 top value=10u
C5 "Cap" CAPC0402-01 1147,1155.29 r90 top value=680p
C6 "Cap_225M25VX5R0402_1" CAPC0402-01 860.58,1109.8 r0 top value=2.2u
C7 "Cap" CAPC0402-01 105.53,1156.8 r90 bottom value=10n
C8 "Cap" CAPC0402-01 208.53,1129.8 r90 bottom value=1.0u
C9 "Cap" CAPC0402-01 1256.58,1268.8 r270 top value=1.0u
C10 "Cap" CAPC0402-01 1533.58,1308.08 r270 top value=10u
C11 "Cap" CAPC0402-01 1548.53,1212.8 r180 top value=680p
C12 "Cap_225M25VX5R0402_1" CAPC0402-01 1257.58,1199.8 r90 top value=2.2u
C13 "Cap" CAPC0402-01 354.53,732.8 r270 top value=10n
C14 "Cap" CAPC0402-01 120.53,503.8 r90 bottom value=1.0u
C17 "Cap" CAPC0402-01 2430.58,1320.8 r180 bottom value=10u
C18 "Cap" CAPC0402-01 2746.82,1380.8 r180 bottom value=1.0u
C19 "Cap" CAPC0402-01 2479.58,1246.8 r180 bottom value=10u
C20 "Cap" CAPC0402-01 2479.58,1089.8 r0 top value=1.0u
C21 "Cap" CAPC0402-01 2330.58,1341.8 r0 bottom value=100n
C22 "Cap" CAPC0402-01 2586.58,1433.8 r270 bottom value=100n
C23 "Cap" CAPC0402-01 2711.6,1521.6 r0 bottom value=1.0u
C24 "Cap_225M25VX5R0402_1" CAPC0402-01 2662.8,1563.8 r0 bottom value=2.2u
C25 "Cap" CAPC0402-01 2581.58,1361.8 r90 bottom value=100n
C26 "Cap" CAPC0402-01 2507.58,1454.8 r180 bottom value=100n
C27 "Cap" CAPC0402-01 2539.58,1083.51 r90 top value=1.0u
C28 "Cap" CAPC0402-01 2329.58,1388.8 r0 bottom value=1.0u
C29 "Cap" CAPC0402-01 2150.53,1310.8 r90 top value=100n
C30 "Cap" CAPC0402-01 2630.58,1253.8 r90 bottom value=100n
C31 "Cap" CAPC0402-01 2582.53,1171.8 r90 bottom value=1.0u
C32 "Cap" CAPC0402-01 2141.53,1400.8 r270 top value=1.0u
C33 "Cap" CAPC0402-01 2202.53,1435.8 r0 top value=100n
C34 "Cap" CAPC0402-01 2331.58,1292.8 r180 bottom value=10n
C37 "Cap" CC0201_RF10 2585.2,1578.79 r270 top value=4p0
C38 "Cap" CC0201_RF10 2608.5,1578.69 r270 top value=16p
C39 "Cap" CC0201_RF10 2596.8,1631.4 r180 top value=2p2
C40 "Cap" CC0201_RF10 2597,1696 r180 top value=2p0
C41 "Inductor" LC0201_RF10 2611.5,2237.31 r180 top value=13n
C42 "Cap" CC0201_RF10 2611.88,2303.31 r0 top value=tbd
C43 "Cap" CAPC0402-01 3020.53,714.51 r90 top value=10u
C44 "Cap" CAPC0402-01 3177.58,1331.8 r270 bottom value=100n
C45 "Cap" CAPC0402-01 3317.61,1985.88 r0 bottom locked value=100n
C46 "Cap" CAPC0402-01 3138.58,1295.8 r90 bottom value=100n
C47 "Cap" CAPC0402-01 3302.53,1393.8 r180 bottom value=100n
C48 "Cap" CAPC0402-01 3511.61,1893.88 r180 bottom locked value=100n
C49 "Cap" CAPC0402-01 3233.61,1851.88 r0 bottom value=100n
C50 "Cap" CAPC0402-01 4677.53,1520.8 r90 bottom value=100n
C51 "Cap" CAPC0402-01 4934,1634 r180 bottom value=100n
C52 "Cap" CAPC0402-01 4831.53,1631.8 r180 bottom value=100n
C53 "Cap_225M25VX5R0402_1" CAPC0402-01 4621.53,1521.8 r90 bottom value=2.2u
C54 "Cap_225M25VX5R0402_1" CAPC0402-01 4812,1563 r270 bottom value=2.2u
C55 "Cap" CAPC0402-01 929.58,1420.8 r0 top value=100n
C56 "Cap" CAPC0402-01 1246.74,1635.37 r180 bottom value=100n
C57 "Cap" CAPC0402-01 1245,1683 r180 bottom value=100n
C58 "Cap" CAPC0402-01 1388.58,1629.8 r270 top value=100p
C59 "Cap_225M25VX5R0402_1" CAPC0402-01 1338.58,1453.8 r180 top value=2.2u
C60 "Cap" CAPC0402-01 1183.58,1435.8 r90 top value=4.7u
C61 "Cap" CAPC0402-01 1132.58,1434.51 r90 top value=100n
C62 "Cap" CAPC0402-01 1233.58,1435.8 r90 top value=100n
C63 "Cap" CAPC0402-01 1188.58,1812.8 r270 top value=4.7u
C64 "Cap" CAPC0402-01 1079.58,1753.8 r270 bottom value=100n
C65 "Cap" CAPC0402-01 1134,1752 r270 bottom value=4.7u
C66 "Cap" CAPC0402-01 1138.58,1810.8 r270 top value=4.7u
C67 "Cap_225M25VX5R0402_1" CAPC0402-01 1336.58,1500.8 r180 top value=2.2u
C68 "Cap_225M25VX5R0402_1" CAPC0402-01 1335.58,1548.8 r180 top value=2.2u
C69 "CAP-P" CAP_0603_TCS_M_ROM-L 915,1654.5 r270 top value="10u 6V3"
C70 "Cap" CAPC0402-01 945,1826 r0 bottom value=220p
C71 "Cap" CAPC0402-01 916,1654 r90 bottom value=1.0u
C72 "Cap" CAPC0402-01 1015.58,1766.8 r90 bottom value=1.0u
C73 "Cap" CAPC0402-01 1056.72,1925 r0 bottom value=220p
C74 "CAP-P" CAP_0603_TCS_M_ROM-L 1012.58,1768.8 r270 top value="10u 6V3"
C75 "Cap" CAPC0402-01 863.58,1272.8 r0 top value=1.0u
C76 "Cap" CAPC0402-01 943.96,1536.02 r0 bottom value=10u
C77 "Cap" CAPC0402-01 3541.58,881.8 r0 bottom value=100n
C78 "Cap" CAPC0402-01 4137.29,888 r180 bottom value=100n
C79 "Cap" CAPC0402-01 855.53,399.8 r0 bottom value=100n
C80 "Cap" CAPC0402-01 2385,361 r0 top value=100n
C81 "Cap" CAPC0402-01 3306.25,2061.8 r0 bottom value=100n
C82 "Cap" CAPC0402-01 4289.53,2044.8 r0 bottom value=100n
C83 "Cap" CAPC0402-01 4651,1363 r90 bottom value=100n
C84 "Cap" CAPC0402-01 3632.58,1625.8 r90 top value=100n
C85 "Cap_225M25VX5R0402_1" CAPC0402-01 3624.58,1511.51 r90 top value=2.2u
C86 "Cap" CAPC0402-01 2591,1558 r0 bottom value=4.7u
C87 "Cap" CAPC0402-01 3884.58,417.8 r90 top value=100n
C88 "Cap" CAPC0402-01 4418,414 r180 top value=100n
C89 "Cap" CAPC0402-01 4788,2356 r180 bottom value=100n
C90 "Cap" CAPC0402-01 3326.58,1095.8 r180 top value=100n
C91 "Cap" CAPC0402-01 3329,1162 r180 top value=100n
C92 "Cap" CAPC0402-01 4759,340 r0 bottom value=100n
C93 "Cap" CAPC0402-01 4870,538 r90 bottom value=100n
C94 "Cap_225M25VX5R0402_1" CAPC0402-01 4958,384 r0 bottom value=2.2u
C95 "Cap" CAPC0402-01 5024,827 r270 bottom value=4n7
C96 "Cap" CAPC0402-01 3633.29,420 r0 bottom value=10u
C97 "Cap" CAPC0402-01 3953.53,1082.8 r180 top value=470n
C98 "Cap" CAPC0402-01 3633,373 r0 bottom value=100n
C99 "Cap" CAPC0402-01 3560,422 r0 bottom value=10u
C100 "Cap_225M25VX5R0402_1" CAPC0402-01 3400.53,975.8 r90 top value=2.2u
C101 "Cap" CAPC0402-01 3450.53,977.08 r270 top value=100n
C102 "Cap" CAPC0402-01 3560,375 r180 bottom value=100n
C103 "Cap_225M25VX5R0402_1" CAPC0402-01 4289,539 r0 bottom value=2.2u
C104 "Cap" CAPC0402-01 2249,725 r0 top locked value=100n
C105 "Cap" CAPC0402-01 2249,775 r0 top value=4.7u
C106 "Cap" CAPC0402-01 2403.58,826.8 r180 bottom value=1.0u
C107 "Cap" CAPC0402-01 2637.29,662 r180 top value=4.7u
C108 "Cap" CAPC0402-01 2548.58,557.08 r90 top value=100n
C109 "Cap" CAPC0402-01 2252.58,674.8 r0 top value=100n
C110 "Cap" CAPC0402-01 4174,1542.54 r270 bottom value=1.0u
C111 "Cap" CAPC0402-01 4436,1678 r0 bottom value=100n
C112 "Cap" CAPC0402-01 4513,1682 r0 bottom value=100n
C113 "Cap_225M25VX5R0402_1" CAPC0402-01 4459,2038 r0 bottom value=2.2u
C114 "Cap" CAPC0402-01 4448,1847.25 r0 bottom value=100n
C115 "Cap" CAPC0402-01 4458.72,1146.25 r0 bottom value=100n
C116 "Cap_225M25VX5R0402_1" CAPC0402-01 4451.3,940.8 r0 bottom value=2.2u
C117 "Cap" CAPC0402-01 4412,1586.25 r180 bottom value=100n
C118 "Cap" CAPC0402-01 4632,1587.25 r0 bottom value=100n
C119 "Cap_225M25VX5R0402_1" CAPC0402-01 1042.58,649.8 r90 bottom value=2.2u
C120 "Cap" CAPC0402-01 839.53,759.8 r0 top value=1.0u
C121 "Cap" CAPC0402-01 1172.53,483.8 r90 top value=10u
C122 "Cap" CAPC0402-01 843.53,826.8 r0 top value=100n
C123 "Cap" CAPC0402-01 1112.58,484.59 r90 top value=1.0u
C124 "Cap" CAPC0402-01 948.53,580.8 r270 bottom value=100n
C125 "Cap" CAPC0402-01 995.53,650.8 r90 bottom value=100n
C126 "Cap" CAPC0402-01 1299.53,508.8 r180 top value=100n
C127 "Cap" CAPC0402-01 818.53,926.8 r0 top value=100n
C128 "Cap" CAPC0402-01 843.53,875.8 r0 top value=100n
C129 "Cap" CAPC0402-01 1425.53,947.8 r90 top value=100n
C130 "Cap" CAPC0402-01 1283.53,1006.8 r90 top value=1.0u
C131 "Cap" CAPC0402-01 1233.58,705.8 r180 bottom value=100n
C132 "Cap" CAPC0402-01 1359.53,796.08 r90 bottom value=100n
C133 "Cap" CAPC0402-01 1049.53,904.8 r180 bottom value=100n
C134 "Cap" CAPC0402-01 929.53,906.8 r0 bottom value=100n
C135 "Cap" CAPC0402-01 1173.53,482.8 r90 bottom value=1.0u
C136 "Cap" CAPC0402-01 1239.53,475.8 r90 top value=1.0u
C137 "Cap" CAPC0402-01 1166,565.72 r90 bottom value=1.0u
C138 "Cap" CAPC0402-01 805.53,575.8 r0 top value=1.0u
C139 "Cap" CAPC0402-01 595.53,780.8 r0 top value=100n
C140 "Cap" CAPC0402-01 592.53,830.8 r0 top value=1.0u
C141 "Cap" CAPC0402-01 956.53,462.8 r90 top value=1.0u
C142 "Cap" CAPC0402-01 804.53,637.8 r0 top value=1.0u
C143 "Cap" CAPC0402-01 840.53,708.8 r0 top value=100n
C144 "Cap" CAPC0402-01 465.53,449.8 r0 top value=10u
D1 "Zener" SOT-23_DBZ_TEX 435.53,1296.8 r270 top value="5V 0p6"
D2 "SML-LX0404SIUPGUSB" LED_SML-LX0404_LUM 3719.58,1385.8 r180 top
D3 "Zener" SOT-23_DBZ_TEX 412.53,629.8 r270 top value="5V 0p6"
D4 "D Schottky" SOD123F_NXP 481,1122 r90 bottom value="40V  1A"
D5 "D Schottky" SOD123F_NXP 553.53,928.8 r270 bottom value="40V  1A"
D6 "D LED2" LED_0603-GRN_AK 867,1000 r270 top value=GREEN
D8 "ESD2CAN24" WE-TVS_SOT23-3L 4986,660 r90 bottom
D9 "D Schottky" SOD123F_NXP 3912,1014 r180 top value="40V  1A"
D10 "SML-LX0404SIUPGUSB" LED_SML-LX0404_LUM 1503.53,574.8 r180 top
F1 "0ZCJ0050FF2G" RESC3216X125N_1206 260,1831 r180 bottom
FB1 "Ind_WBC_1A5_120@100M0402_1" FB_0402_MuRata_as_R0402 311.58,1717.8 r180 bottom value=WBC
FB2 "Ind_WBC_1A5_120@100M0402_1" FB_0402_MuRata_as_R0402 156.53,1159.8 r270 bottom value=WBC
FB3 "Ind_WBC_1A5_120@100M0402_1" FB_0402_MuRata_as_R0402 354.53,1052.8 r90 bottom value=WBC
FB4 "Ind_WBC_1A5_120@100M0402_1" FB_0402_MuRata_as_R0402 165.53,560.8 r180 bottom value=WBC
FB5 "Ind_WBC_1A5_120@100M0402_1" FB_0402_MuRata_as_R0402 342.53,422.8 r270 top value=WBC
FB8 "Ind_WBC_1A5_120@100M0402_1" FB_0402_MuRata_as_R0402 2694,1655 r180 bottom value=WBC
FB9 "Res3" RESC0402-01 2695,1610 r0 bottom value=10R0
FB10 "Ind_WBC_1A5_120@100M0402_1" FB_0402_MuRata_as_R0402 1337.58,1598.8 r0 top value=WBC
FB11 "Ind_WBC_1A5_120@100M0402_1" FB_0402_MuRata_as_R0402 1336.58,1676.8 r0 top value=WBC
FB12 "Ind_WBC_1A5_120@100M0402_1" FB_0402_MuRata_as_R0402 2466,1600 r270 bottom value=WBC
H1 "HOLE_128" Hole_#4 200,200 r180 top
H2 "HOLE_128" Hole_#4 200,2500 r180 top
H3 "HOLE_128" Hole_#4 4999.58,2501.8 r180 top
H4 "HOLE_128" Hole_#4 4999.58,199.8 r180 top
J1 "1-1734775-1" 614004134726 342.75,1831 r270 top locked
J2 "USB4110GFA" CONN_USB_C_GCT_USB4110GFA 247.7,1300 r270 top locked
J3 "USB4110GFA" CONN_USB_C_GCT_USB4110GFA 247,619 r270 top locked
J5 "MM8130-2600" CONN_U.FL_SWITCH_MURATA_MM8130-2600RA2 2623.53,2130.8 r180 top
J6 "104031-0811" CONN_SD_MOLEX_104031-0811 4931,1493.25 r90 top locked
J7 "SJ-3524-SMT-TR-GR" CONN_CUI_SJ-3524-SMT-TR-XX_CUD 1357,2388 r0 top locked
J8 "SJ-3524-SMT-TR-BE" CONN_CUI_SJ-3524-SMT-TR-XX_CUD 827,2389 r0 top locked
J9 "PRPC010DFAN-RC" CON20_2X10_P100UM_HDR_TYC 3427,696 r0 top locked
J10 "PRPC020DFAN-RC" CON40_2X20_P100UM_HDR_TYC 700,150 r0 top locked
J11 "PRPC015DFAN-RC" CON30_2X15_P100UM_HDR_TYC 3176,2157 r0 top locked
J12 "Hdr_M_2X10_1M27_STRT_KEY_CORTEX_1" SAMTEC_FTSH-110-01-X-DV-007-K 3668,204.23 r180 top locked value=2x10M_1m27
J13 "Hdr_M_2X5_1M27_STRT_KEY_CORTEX_1" SAMTEC_FTSH-105-01-DV-007-K 4348,207 r180 top value=2x5M_1m27
J14 "TSW-105-07-G-S" CONN_HDR_1X4_STRT_0.100 5114,652 r270 top
J15 "TSW-103-07-G-S" CONN_HDR_1X3_STRT_0.100_no3D 4079,998 r90 top
J16 "FH52-20S-0.5SH" CONN_FPC_BOT-ENT_FRONT-LOCK_0.50_20_reversed 3685.96,231 r180 bottom locked
J17 "FH52-8S-0.5SH" CONN_FPC_BOT-ENT_FRONT-LOCK_0.50_8_reversed 4227,447 r180 bottom locked
J19 "Hdr_F_1x8_2.5MM_STRT_UNSH_1" RHDR8W80P0X254_1X8_2082X254X850P 5102,1942.25 r180 top locked value=1x8F_2.54mm
J20 "Hdr_F_1x8_2.5MM_STRT_UNSH_1" RHDR8W80P0X254_1X8_2082X254X850P 5102,1042.25 r180 top value=1x8F_2.54mm
J21 "TSW-103-07-G-S" CONN_HDR_1X3_STRT_0.100_no3D 1919,385 r0 top
J22 "PGMG_CONTACT,14P,TC2070-IDC_1" TC2070-IDC 1712,928 r0 bottom locked value=PGM_ARRAY
J23 "TSW-103-07-G-S" CONN_HDR_1X3_STRT_0.100_no3D 1357,390 r0 top
JP1 "TSW-102-07-G-S" CONN_77311-146-02LF_AMP_HDR_1x2_2.5MM_STRT_no#D 3985.53,1935.8 r90 top
JP2 "TSW-102-07-G-S" CONN_77311-146-02LF_AMP_HDR_1x2_2.5MM_STRT_no#D 3112.53,691.8 r90 top
JP3 "TSW-103-07-G-S" CONN_HDR_1X3_STRT_0.100_no3D 3809.53,1974.8 r270 top
JP4 "TSW-102-07-G-S" CONN_77311-146-02LF_AMP_HDR_1x2_2.5MM_STRT_no#D 3254.53,691.8 r90 top
JP5 "TSW-102-07-G-S" CONN_77311-146-02LF_AMP_HDR_1x2_2.5MM_STRT_no#D 4145.53,1936.8 r90 top
JP6 "TSW-103-07-G-S" CONN_HDR_1X3_STRT_0.100_no3D 3640.53,1974.8 r270 top
JP7 "TSW-103-07-G-S" CONN_HDR_1X3_STRT_0.100_no3D 1748.58,1348.8 r90 top
JP9 "TSW-103-07-G-D" HDRV6W64P254_2X3_762X508X838P 3964,1618.25 r270 top
L1 "Inductor" IND_WE-KI_0402 2410.53,1226.8 r0 bottom value=8n2
L2 "Inductor" IND_0806_2016_SAM 2410,1160 r180 bottom value=2u2
L3 "Inductor" LC0201_RF10 2585.2,1663.6 r90 top value=2n3
L4 "Res3" RC0201_RF10 2585.3,1727.61 r90 top value=0R
L5 "Cap" CC0201_RF10 2623.5,2270.31 r270 top value=1p2
L6 "Inductor" IND_IFSC_1515AH_VIS-M 3680.53,991.8 r0 top value=4u7
L7 "Inductor" IND_WE-KI_0402 1064.53,497.8 r270 top value=8n2
L8 "Inductor" INDC2520X120N 988.53,407.8 r180 bottom value=2.2u
PD1 "PAD_10x10" PAD_RF10x10#1 2562,1631.8 r180 top
PD2 "PAD_10x10" PAD_RF10x10#2 2562.2,1696 r180 top
Q1 "NMOS-2_SOT" SC75_SSM_TOS-L 3867,1131 r0 bottom value="20V  180mA  2.4Ohm"
Q2 "NMOS-2_SOT" SC75_SSM_TOS-L 3769.69,1131.43 r0 bottom value="20V  180mA  2.4Ohm"
Q3 "NMOS-2_SOT" SC75_SSM_TOS-L 3671,1133 r0 bottom value="20V  180mA  2.4Ohm"
Q4 "NMOS-2_SOT" SC75_SSM_TOS-L 4576,1278.25 r90 bottom value="20V  180mA  2.4Ohm"
Q5 "NMOS-2_SOT" SC75_SSM_TOS-L 4678.58,1170.94 r90 bottom value="20V  180mA  2.4Ohm"
Q6 "NMOS-2_SOT" SC75_SSM_TOS-L 2517,949 r0 bottom value="20V  180mA  2.4Ohm"
Q7 "NMOS-2_SOT" SC75_SSM_TOS-L 2622,951 r0 bottom value="20V  180mA  2.4Ohm"
Q8 "NMOS-2_SOT" SC75_SSM_TOS-L 2726,951 r0 bottom value="20V  180mA  2.4Ohm"
R1 "Res3" RESC0402-01 1180.69,1232 r180 top value=3K57
R2 "Res3" RESC0402-01 1201,1173.32 r90 top value=1K15
R3 "Res3" RESC0402-01 1585.5,1262.1 r90 top value=3K57
R4 "Res3" RESC0402-01 1642.37,1238 r180 top value=2K87
R5 "Res3" RESC0402-01 470.69,671 r180 bottom value=0R0
R6 "Res3" RESC0402-01 470.69,598 r180 bottom value=0R0
R7 "Res3" RESC0402-01 3862,1046 r270 bottom value=1K82
R8 "Res3" RESC0402-01 471,663 r180 top value=0R0
R9 "Res3" RESC0402-01 470,592 r180 top value=0R0
R10 "Res3" RESC0402-01 3768,1040.32 r90 bottom value=1K00
R11 "Res3" RESC0402-01 3869,1208 r180 bottom value=100K
R12 "Res3" RESC0402-01 3671,1051 r270 bottom value=681R
R13 "Res3" RESC0402-01 3772,1210 r180 bottom value=100K
R14 "Res3" RESC0402-01 939,1002 r90 top value=1K82
R15 "Res3" RESC0402-01 3667,1208 r180 bottom value=100K
R16 "Res3" RESC0402-01 2976.53,391.48 r90 top value=0R0
R17 "Res3" RESC0402-01 2418,1601 r90 bottom value=1R00
R18 "Res3" RESC0402-01 145.53,1347.8 r180 bottom value=5K11
R19 "Res3" RESC0402-01 139.53,1227.8 r180 bottom value=5K11
R20 "Res3" RESC0402-01 162.53,669.8 r180 bottom value=5K11
R21 "Res3" RESC0402-01 161.53,612.8 r180 bottom value=5K11
R22 "Res3" RESC0402-01 2541.53,1241.8 r90 bottom value=1K00
R23 "Res3" RESC0402-01 2216.53,1336.8 r0 top value=10R0
R24 "Res3" RESC0402-01 2216.53,1288.8 r0 top value=1M00
R25 "Res3" RESC0402-01 457.69,1258 r180 bottom value=20K0
R26 "Res3" RESC0402-01 373,1279 r180 bottom value=10K0
R27 "Res3" RESC0402-01 2868.58,1384.8 r180 bottom value=200R
R28 "Res3" RESC0402-01 2661.52,1081.25 r270 top value=200R
R29 "Res3" RESC0402-01 2867.58,1316.8 r180 top value=100K
R30 "Res3" RESC0402-01 3091.53,360.8 r0 top locked value=100K
R31 "Res3" RESC0402-01 3394.58,1349.8 r0 top locked value=100K
R32 "Res3" RESC0402-01 3463.53,1307.8 r0 bottom value=100K
R33 "Res3" RESC0402-01 3018.58,1203.8 r180 bottom value=10K0
R34 "Res3" RESC0402-01 3465.53,1590.8 r180 bottom value=10K0
R35 "Res3" RESC0402-01 3354.61,1757.88 r180 bottom value=100K
R36 "Res3" RESC0402-01 3518.61,1782.88 r0 bottom value=100K
R37 "Res3" RESC0402-01 2869.53,1383.8 r0 top value=0R0
R38 "Res3" RESC0402-01 1230,1752 r270 bottom value=20R0
R39 "Res3" RESC0402-01 1183,1752.32 r270 bottom value=20R0
R40 "Res3" RESC0402-01 968,1656 r90 top value=10K0
R41 "Res3" RESC0402-01 948.32,1832 r180 top value=5K62
R42 "Res3" RESC0402-01 895,1917.32 r270 top value=5K62
R43 "Res3" RESC0402-01 1062,2005 r270 top value=5K62
R44 "Res3" RESC0402-01 1057,1932 r180 top value=5K62
R45 "Res3" RESC0402-01 1089.58,1811.8 r90 top value=10K0
R46 "Res3" RESC0402-01 862.58,1220.8 r0 top value=100K
R47 "Res3" RESC0402-01 939.96,1593.02 r180 bottom value=10K0
R48 "Res3" RESC0402-01 880.96,1567.02 r270 bottom value=20K0
R49 "Res3" RESC0402-01 3810.58,1561.8 r0 top value=100K
R50 "Res3" RESC0402-01 4559.53,1532.8 r180 bottom value=20R0
R51 "Res3" RESC0402-01 3700,411 r270 top value=20K0
R52 "Res3" RC0201_RF10 2597,1609 r180 top value=0R
R53 "Res3" RESC0402-01 4702.53,2353.8 r270 bottom value=33R2
R54 "Res3" RESC0402-01 3504,1206 r90 top value=100K
R55 "Res3" RESC0402-01 4835,342.32 r90 bottom value=33R2
R56 "Res3" RESC0603-01 4964,781 r270 bottom value=60R4
R57 "Res3" RESC0603-01 4907,780.77 r270 bottom value=60R4
R58 "Res3" RESC0402-01 3859,1189 r180 top value=0R0
R59 "Res3" RESC0402-01 3700,1247 r180 top value=100K
R60 "Res3" RESC0402-01 3859.32,1140 r0 top value=4R99
R61 "Res3" RESC0402-01 3652.58,479.8 r270 bottom value=10K0
R62 "Res3" RESC0402-01 4292,432 r180 top value=5K11
R63 "Res3" RESC0402-01 4292,482 r180 top value=5K11
R64 "Res3" RESC0402-01 4508,411 r0 top value=10K0
R65 "Res3" RESC0402-01 2475.58,555.8 r90 top value=0R0
R66 "Res3" RESC0402-01 2657.58,711.8 r180 top value=0R0
R67 "Res3" RESC0402-01 2657.58,761.8 r180 top value=0R0
R68 "Res3" RESC0402-01 2657.58,812.8 r180 top value=0R0
R69 "Res3" RESC0402-01 2250.58,830.8 r180 top value=10K0
R72 "Res3" RESC0402-01 4990,1806.25 r0 bottom value=5K11
R73 "Res3" RESC0402-01 4663.58,1277.8 r180 bottom value=5K11
R74 "Res3" RESC0402-01 4815.69,1173.25 r180 bottom value=5K11
R75 "Res3" RESC0402-01 5083.53,2034.8 r0 top value=100K
R76 "Res3" RESC0402-01 4922.53,2036.8 r180 top value=49K9
R77 "Res3" RESC0402-01 3792.58,1686.8 r0 top value=1K82
R78 "Res3" RESC0402-01 3827.53,1457.8 r90 top value=1K82
R79 "Res3" RESC0402-01 2743,1477.6 r180 bottom value=0R0
R81 "Res3" RESC0402-01 1517.34,1683.39 r270 top value=100K
R82 "Res3" RESC0402-01 1519,1571.69 r90 top value=100K
R83 "Res3" RESC0402-01 3971.58,550.8 r0 top value=1K82
R84 "Res3" RESC0402-01 4055,550 r180 top value=1K82
R85 "Res3" RESC0402-01 1141.53,682.8 r180 bottom value=1K00
R86 "Res3" RESC0402-01 1014.53,497.48 r90 top value=10R0
R87 "Res3" RESC0402-01 2170,1516 r0 top value=0R0
R88 "Res3" RESC0402-01 616,676 r180 top value=20K0
R89 "Res3" RESC0402-01 610,599.32 r270 top locked value=10K0
R90 "Res3" RESC0402-01 842.53,842.8 r0 bottom value=200R
R91 "Res3" RESC0402-01 1169.53,1000.8 r270 bottom value=100K
R92 "Res3" RESC0402-01 1127.53,749.11 r90 bottom value=100K
R93 "Res3" RESC0402-01 2423.58,892.8 r270 bottom value=1K82
R94 "Res3" RESC0402-01 2525,872 r270 bottom value=20K0
R95 "Res3" RESC0402-01 2610,1020 r180 bottom value=100K
R96 "Res3" RESC0402-01 2630,873 r270 bottom value=681R
R97 "Res3" RESC0402-01 2716,1021 r180 bottom value=100K
R98 "Res3" RESC0402-01 2819,1021 r180 bottom value=100K
R101 "Res3" RESC0402-01 2677.58,741.8 r270 bottom value=0R0
R102 "Res3" RESC0402-01 2822.58,816.8 r0 top value=0R0
R103 "Res3" RESC0402-01 1695.53,1014.8 r0 top value=20K0
S1 "SolderJumperShorted_Small" Solderbridge_Shorted#1 1153.3,1289 r0 bottom net-tie
S2 "SolderJumperShorted_Small" Solderbridge_Shorted#1 1460,1338 r180 bottom net-tie
S3 "SolderJumperShorted_Small" Solderbridge_Shorted#1 923.58,1101.8 r0 bottom net-tie
S4 "SolderJumperShorted_Small" Solderbridge_Shorted#1 2928.58,1204.8 r0 bottom net-tie
S5 "SolderJumperShorted_Small" Solderbridge_Shorted#1 2797,1308 r0 bottom net-tie
S6 "Res3" RESC0402-01 810.53,1387.8 r270 bottom value=0R0
S7 "SolderJumperShorted_Small" Solderbridge_Shorted#1 4962.53,431.8 r180 top net-tie
S8 "SolderJumperShorted_Small" Solderbridge_Shorted#1 3637.58,886.8 r0 bottom net-tie
S9 "SolderJumperShorted_Small" Solderbridge_Shorted#1 3716.58,885.8 r0 bottom net-tie
S10 "SolderJumperShorted_Small" Solderbridge_Shorted#1 2040.98,1714.04 r0 bottom net-tie
S11 "SolderJumperShorted_Small" Solderbridge_Shorted#1 2041.98,1641.04 r0 bottom net-tie
S14 "SolderJumperShorted_Small" Solderbridge_Shorted#1 4058.23,492 r180 bottom net-tie
S15 "SolderJumperShorted_Small" Solderbridge_Shorted#1 3934.33,500 r180 bottom net-tie
S16 "SolderJumperShorted_Small" Solderbridge_Shorted#2 2118,551 r270 bottom net-tie
S17 "SolderJumperShorted_Small" Solderbridge_Shorted#1 2019,552 r270 bottom net-tie
SH1 "SolderJumperShorted_Small" Solderbridge_Shorted#1 4055.53,1886.8 r90 bottom net-tie
SH2 "SolderJumperShorted_Small" Solderbridge_Shorted#1 3181.53,633.8 r90 bottom net-tie
SH3 "SolderJumperShorted_Small" Solderbridge_Shorted#1 3883.53,1829.8 r270 bottom net-tie
SH4 "SolderJumperShorted_Small" Solderbridge_Shorted#1 3314.53,636.8 r90 bottom net-tie
SH5 "SolderJumperShorted_Small" Solderbridge_Shorted#1 4221.53,1894.8 r90 bottom net-tie
SH6 "SolderJumperShorted_Small" Solderbridge_Shorted#1 3725.53,1830.8 r90 bottom net-tie
SH7 "SolderJumperShorted_Small" Solderbridge_Shorted#1 1839.53,1503.8 r270 bottom net-tie
SW1 "SPDT" SW_450301014042_WRE 643.58,1029.8 r180 top value=SPDT-3Pin
SW2 "SW-SPST" SW_1825966-TL1107-1 3013.53,205.8 r0 top value=TL1107
SW3 "JS1400BFQ_5SW" SW_JS1400BFQ 4697,649.2 r180 top locked
SW4 "CL-SB-23A-01T" SW_CL-SB-23A-01_NDC-M 1735.53,2034.8 r0 top
SW5 "SPDT" SW_SPDT_OS10201MSQN1 1800.53,615.8 r0 top value=SPDT-5Pin
TP1 "TP_SMPAD" TP_30_RND 483.58,1335.8 r0 bottom
TP2 "TP_SMPAD" TP_30_RND 468.53,901.8 r0 bottom
TP6 "TP_SMPAD" TP_30_RND 4035.53,2052.8 r0 bottom
TP7 "TP_SMPAD" TP_30_RND 4501,512 r0 bottom
TP8 "TP_SMPAD" TP_30_RND 2395.3,1756.8 r0 bottom
TP9 "TP_SMPAD" TP_30_RND 1734,461 r0 bottom
TP10 "TP_SMPAD" TP_30_RND 567.53,2049.8 r0 bottom
TP11 "TP_SMPAD" TP_30_RND 700,503 r0 bottom
TP12 "TSW-101-07-G-S" CONN_77311-146-01LF_AMP_HDR_1X1_2.5MM_STRT_No3D 1907.58,1157.8 r180 top
TP13 "TP_SMPAD" TP_30_RND 2687.63,1236.63 r0 bottom
TP14 "TP_SMPAD" TP_30_RND 2378.35,1435.63 r0 bottom
TP15 "TP_SMPAD" TP_30_RND 2261.58,1509.8 r0 bottom
TP16 "TP_SMPAD" TP_30_RND 2250.58,1181.8 r0 bottom
TP17 "TP_SMPAD" TP_30_RND 2452.53,1090.8 r0 bottom
TP18 "TP_SMPAD" TP_30_RND 2390.53,996.8 r0 bottom
TP19 "TP_SMPAD" TP_30_RND 2831,1541 r0 bottom
TP20 "TP_SMPAD" TP_30_RND 2460.53,1706.8 r0 bottom
TP22 "TP_SMPAD" TP_30_RND 2509,1047 r0 bottom
TP23 "TP_SMPAD" TP_30_RND 2243,1585 r0 bottom
TP24 "TP_SMPAD" TP_30_RND 2759.53,1430.8 r0 bottom
TP25 "TP_SMPAD" TP_30_RND 2975.58,1423.8 r0 bottom locked
TP26 "TP_SMPAD" TP_30_RND 3245.58,1569.8 r0 bottom
TP27 "TP_SMPAD" TP_30_RND 3370.99,1697.25 r0 bottom
TP28 "TP_SMPAD" TP_30_RND 3496.58,1535.8 r0 bottom
TP29 "TP_SMPAD" TP_30_RND 1289,1769 r270 bottom
TP30 "TP_SMPAD" TP_30_RND 1387.58,1718.8 r270 bottom
TP31 "TP_SMPAD" TP_30_RND 1386.58,1779.8 r270 bottom
TP32 "TP_SMPAD" TP_30_RND 1033.58,1444.8 r270 bottom
TP33 "TP_SMPAD" TP_30_RND 3620.58,1518.8 r0 bottom
TP34 "TP_SMPAD" TP_30_RND 3895,296 r0 bottom
TP35 "TP_SMPAD" TP_30_RND 3832,296 r0 bottom
TP36 "TP_SMPAD" TP_30_RND 3770,570 r0 bottom
TP37 "TP_SMPAD" TP_30_RND 3708,569 r0 bottom
TP38 "TP_SMPAD" TP_30_RND 3628,567 r0 bottom
TP39 "TP_SMPAD" TP_30_RND 3565,566 r0 bottom
TP40 "TP_SMPAD" TP_50_RND 2303.58,617.8 r0 bottom
TP41 "TP_SMPAD" TP_50_RND 2433.58,615.8 r0 bottom
TP42 "TP_SMPAD" TP_50_RND 2772.58,783.8 r0 bottom
TP43 "TP_SMPAD" TP_50_RND 2769.58,871.8 r0 bottom
TP44 "TP_SMPAD" TP_50_RND 2183.58,820.8 r0 bottom
TP45 "TP_SMPAD" TP_30_RND 1364,973 r0 bottom
TP46 "TP_SMPAD" TP_30_RND 913.53,796.8 r0 bottom
TP47 "TP_SMPAD" TP_30_RND 690.53,703.8 r0 bottom
TP48 "TP_SMPAD" TP_30_RND 690.53,612.8 r0 bottom
TP49 "TP_SMPAD" TP_30_RND 760.53,735.8 r0 bottom
TP50 "TP_SMPAD" TP_30_RND 879,576 r0 bottom
TP51 "TP_SMPAD" TP_30_RND 1244,463 r0 bottom
TP52 "TP_SMPAD" TP_30_RND 1236.53,529.8 r0 bottom
TP53 "TP_SMPAD" TP_30_RND 1422.53,872.8 r0 bottom
TP54 "TP_SMPAD" TP_30_RND 638.53,815.8 r0 bottom
TP55 "TP_SMPAD" TP_30_RND 1233,998 r0 bottom
TP56 "TP_SMPAD" TP_30_RND 760.58,658.8 r0 bottom
TP57 "TP_SMPAD" TP_30_RND 1116,990 r0 bottom
TP58 "TP_SMPAD" TP_30_RND 1460.53,746.8 r90 bottom
TP59 "TP_SMPAD" TP_30_RND 1421.53,688.8 r90 bottom
U1 "AP7173-FNG-7" UDFN3030-10_SON50P300X300X63-11N 1041,1193 r0 top
U2 "AP7173-FNG-7" UDFN3030-10_SON50P300X300X63-11N 1407,1238 r0 top locked
U3 "Alif_E _Series_BGA120" BGA120_SOCKET-NO_SOCK_3D 2544.95,1417.06 r270 top locked
U5 "STM1061N17WX6F" SOT-23_DBZ_TEX 2925.53,711.8 r0 top
U6 "IC_OctalSPI_Generic_1" BGA24C100P5X5_800X600X100N 3374,1496 r270 top locked
U7 "IC_OctalSPI_Generic_1" BGA24C100P5X5_800X600X100N 3373.98,1863.88 r270 top locked
U8 "NVT4857UKAZ" WLCSP20_NVT4857_NXP 4891.13,1539 r180 bottom
U9 "WM8904CGEFL_V" QFN40P400X400X80-33N 1168,1596 r90 top locked
U10 "NCV8164ASNADJT1G" TSOT23-5_ONS 923.96,1390.02 r90 bottom
U11 "TPS22919DCK" SOT363_DIO 4552,1428 r90 bottom
U12 "ICM-42670-P_1" IC_ICM-42670-P 3710.58,1581.8 r270 top value=Gyro_Accel
U14 "T5838" MIC_T5838#1 4770,2495 r90 bottom value="PDM Mic"
U15 "BMI323" PQFN50P250X300X88-14N 3421,1141 r270 top locked
U16 "T5838" MIC_T5838#2 4770,195 r270 bottom locked value="PDM Mic"
U17 "TCAN1044V" DFN8_2x3_SON8_DRB_TEX-M 4960,495 r90 bottom
U18 "MP3301GJ" TSOT23-5_ONS 3727,1154 r180 top
U19 "CY7C65215A-32LTXI" QFN32_5x5x1-0p5_INF-M_no3D 2444.58,726.8 r180 top
U20 "XU0101" SOT363_TI 4479,1744.25 r0 bottom locked
U21 "TXB0108PWR" TSSOP20_TI_PW0020A_M 4434.93,1497.46 r0 top
U22 "Alif_E _Series_BGA194" "BGA194 _CENTERED" 1181.69,747.69 r270 top locked
U23 "STM1061N17WX6F" SOT-23_DBZ_TEX 477.83,312.8 r180 top
Y1 "Xtal_38M4_20PPM6PF_2016-4P_1" OSC_4p_2016_XRCGB38M400F2P00R0 2866.53,1460.8 r90 top value=38M400
Y2 "Xtal_32K768_20PPM6PF_3215-2P_1" XTAL_ABS07_ABR-M 2223.53,1303.8 r270 bottom value=32K768
Y3 "XO_12M288" OSC_4P_3225_1210_uChip_DSC1001DL5 977,1502 r90 top value=12M288
Y4 "Xtal_38M4_20PPM6PF_2016-4P_1" OSC_4p_2016_XRCGB38M400F2P00R0 1569.53,708.8 r90 top value=38M400
Y5 "Xtal_32K768_20PPM6PF_3215-2P_1" XTAL_ABS07_ABR-M 874.53,686.8 r180 bottom value=32K768

## Footprints (in the part's own frame and the unit in brackets; to place one, negate y for a bottom-side part, rotate by r counter-clockwise, add the part's x,y. Pads: shape width x height; smd on the part's side, far side on the other; paste and mask are expansions set on the pad)
614004134726 [mm] "USB 2.0 Type A Up Right"
  round 1.42 hole 0.92: 1(0,2.68) 2(0,4.68) 3(0,6.68) 4(0,8.68)
  round 2.25 hole 1.5: 5(-2.71,8.95) 6(-2.71,1.95) 7(2.71,1.95) 8(2.71,8.95)
  silkscreen extent -3.55,-9.65 3.55,9.65, body extent -3.55,-9.65 3.55,9.65, height 14.49
ANT_JOT_2450AT43A100_JOD [mil]
  rect 46x87 smd paste+0 mask+4: 1(-133,0) 2(133,0)
  Top Layer keep-out region: -107,-41.5 -107,41.5 107,41.5 107,-41.5
  Keep-Out Layer region: -107,-43.5 -107,43.5 107,43.5 107,-43.5
  silkscreen extent -168,-44 97,44, body extent -138,-39 138,39, height 51
BGA24C100P5X5_800X600X100N [mm]
  round 0.33 smd: A2(-1,2) A3(0,2) A4(1,2) A5(2,2) B1(-2,1) B2(-1,1) B3(0,1) B4(1,1) B5(2,1) C1(-2,0) C2(-1,0) C3(0,0) C4(1,0) C5(2,0) D1(-2,-1) D2(-1,-1) D3(0,-1) D4(1,-1) D5(2,-1) E1(-2,-2) E2(-1,-2) E3(0,-2) E4(1,-2) E5(2,-2)
  silkscreen extent -3.65,-4.05 3.05,4.05, body extent -3,-4 3,4, height 1
BGA120_SOCKET-NO_SOCK_3D [mil] "Alif E1 / B1 BGA120 with Socket"
  round 177 hole 106: 0(-433,433) 0(-433,-433) 0(433,433) 0(433,-433)
  round 63 hole 63 unplated paste-99999 mask+4: 0(-315,-315) 0(315,315) 0(315,-315)
  round 10.5 smd mask+4: A1(-118.11,118.11) A2(-98.43,118.11) A3(-78.74,118.11) A4(-59.06,118.11) A5(-39.37,118.11) A6(-19.68,118.11) A7(0,118.11) A8(19.68,118.11) A9(39.37,118.11) A10(59.05,118.11) A11(78.74,118.11) A12(98.42,118.11) A13(118.11,118.11) B1(-118.11,98.42) B2(-98.43,98.42) B3(-78.74,98.42) B4(-59.06,98.42) B5(-39.37,98.42) B6(-19.68,98.42) B7(0,98.42) B8(19.68,98.42) B9(39.37,98.42) B10(59.05,98.42) B11(78.74,98.42) B12(98.42,98.42) B13(118.11,98.42) C1(-118.11,78.74) C2(-98.43,78.74) C12(98.42,78.74) C13(118.11,78.74) D1(-118.11,59.05) D2(-98.43,59.05) D4(-59.06,59.05) D5(-39.37,59.05) D6(-19.68,59.05) D7(0,59.05) D8(19.68,59.05) D9(39.37,59.05) D10(59.05,59.05) D12(98.42,59.05) D13(118.11,59.05) E1(-118.11,39.37) E2(-98.43,39.37) E4(-59.06,39.37) E10(59.05,39.37) E12(98.42,39.37) E13(118.11,39.37) F1(-118.11,19.68) F2(-98.43,19.68) F4(-59.06,19.68) F6(-19.68,19.68) F7(0,19.68) F8(19.68,19.68) F10(59.05,19.68) F12(98.42,19.68) F13(118.11,19.68) G1(-118.11,0) G2(-98.43,0) G4(-59.06,0) G6(-19.68,0) G7(0,0) G10(59.05,0) G12(98.42,0) G13(118.11,0) H1(-118.11,-19.68) H2(-98.43,-19.68) H4(-59.06,-19.68) H6(-19.68,-19.68) H7(0,-19.68) H8(19.68,-19.68) H10(59.05,-19.68) H12(98.42,-19.68) H13(118.11,-19.68) J1(-118.11,-39.37) J2(-98.43,-39.37) J4(-59.06,-39.37) J10(59.05,-39.37) J12(98.42,-39.37) J13(118.11,-39.37) K1(-118.11,-59.06) K2(-98.43,-59.06) K4(-59.06,-59.06) K5(-39.37,-59.06) K6(-19.68,-59.06) K7(0,-59.06) K8(19.68,-59.06) K9(39.37,-59.06) K10(59.05,-59.06) K12(98.42,-59.06) K13(118.11,-59.06) L1(-118.11,-78.74) L2(-98.43,-78.74) L12(98.42,-78.74) L13(118.11,-78.74) M1(-118.11,-98.43) M2(-98.43,-98.43) M3(-78.74,-98.43) M4(-59.06,-98.43) M5(-39.37,-98.43) M6(-19.68,-98.43) M7(0,-98.43) M8(19.68,-98.43) M9(39.37,-98.43) M10(59.05,-98.43) M11(78.74,-98.43) M12(98.42,-98.43) M13(118.11,-98.43) N1(-118.11,-118.11) N2(-98.43,-118.11) N3(-78.74,-118.11) N4(-59.06,-118.11) N5(-39.37,-118.11) N6(-19.68,-118.11) N7(0,-118.11) N8(19.68,-118.11) N9(39.37,-118.11) N10(59.05,-118.11) N11(78.74,-118.11) N12(98.42,-118.11) N13(118.11,-118.11)
  silkscreen extent -138,-138 138,152, body extent -130,-130 130,131, height 23
"BGA194 _CENTERED" [mm]
  round 0.25 smd: A1(-4.501,4.501) A2(-4.001,4.501) A3(-3.501,4.501) A4(-3.001,4.501) A5(-2.501,4.501) A6(-2.001,4.501) A7(-1.501,4.501) A8(-1.001,4.501) A9(-0.501,4.501) A10(-0.001,4.501) A11(0.499,4.501) A12(0.999,4.501) A13(1.499,4.501) A14(1.999,4.501) A15(2.499,4.501) A16(2.999,4.501) A17(3.499,4.501) A18(3.999,4.501) A19(4.499,4.501) B1(-4.501,4.001) B2(-4.001,4.001) B3(-3.501,4.001) B4(-3.001,4.001) B5(-2.501,4.001) B6(-2.001,4.001) B7(-1.501,4.001) B8(-1.001,4.001) B9(-0.501,4.001) B10(-0.001,4.001) B11(0.499,4.001) B12(0.999,4.001) B13(1.499,4.001) B14(1.999,4.001) B15(2.499,4.001) B16(2.999,4.001) B17(3.499,4.001) B18(3.999,4.001) B19(4.499,4.001) C1(-4.501,3.501) C2(-4.001,3.501) C3(-3.501,3.501) C18(3.999,3.501) C19(4.499,3.501) D1(-4.501,3.001) D2(-4.001,3.001) D18(3.999,3.001) D19(4.499,3.001) E1(-4.501,2.501) E2(-4.001,2.501) E5(-2.501,2.501) E6(-2.001,2.501) E7(-1.501,2.501) E8(-1.001,2.501) E9(-0.501,2.501) E10(-0.001,2.501) E11(0.499,2.501) E12(0.999,2.501) E13(1.499,2.501) E14(1.999,2.501) E15(2.499,2.501) E18(3.999,2.501) E19(4.499,2.501) F1(-4.501,2.001) F2(-4.001,2.001) F5(-2.501,2.001) F15(2.499,2.001) F18(3.999,2.001) F19(4.499,2.001) G1(-4.501,1.501) G2(-4.001,1.501) G5(-2.501,1.501) G15(2.499,1.501) G18(3.999,1.501) G19(4.499,1.501) H1(-4.501,1.001) H2(-4.001,1.001) H5(-2.501,1.001) H15(2.499,1.001) H18(3.999,1.001) H19(4.499,1.001) J1(-4.501,0.501) J2(-4.001,0.501) J5(-2.501,0.501) J8(-1.001,0.501) J9(-0.501,0.501) J10(-0.001,0.501) J11(0.499,0.501) J12(0.999,0.501) J15(2.499,0.501) J18(3.999,0.501) J19(4.499,0.501) K1(-4.501,0.001) K2(-4.001,0.001) K5(-2.501,0.001) K8(-1.001,0.001) K9(-0.501,0.001) K10(-0.001,0.001) K11(0.499,0.001) K12(0.999,0.001) K15(2.499,0.001) K18(3.999,0.001) K19(4.499,0.001) L1(-4.501,-0.499) L2(-4.001,-0.499) L5(-2.501,-0.499) L8(-1.001,-0.499) L9(-0.501,-0.499) L10(-0.001,-0.499) L11(0.499,-0.499) L12(0.999,-0.499) L15(2.499,-0.499) L18(3.999,-0.499) L19(4.499,-0.499) M1(-4.501,-0.999) M2(-4.001,-0.999) M5(-2.501,-0.999) M15(2.499,-0.999) M18(3.999,-0.999) M19(4.499,-0.999) N1(-4.501,-1.499) N2(-4.001,-1.499) N5(-2.501,-1.499) N15(2.499,-1.499) N18(3.999,-1.499) N19(4.499,-1.499) P1(-4.501,-1.999) P2(-4.001,-1.999) P5(-2.501,-1.999) P15(2.499,-1.999) P18(3.999,-1.999) P19(4.499,-1.999) R1(-4.501,-2.499) R2(-4.001,-2.499) R5(-2.501,-2.499) R6(-2.001,-2.499) R7(-1.501,-2.499) R8(-1.001,-2.499) R9(-0.501,-2.499) R10(-0.001,-2.499) R11(0.499,-2.499) R12(0.999,-2.499) R13(1.499,-2.499) R14(1.999,-2.499) R15(2.499,-2.499) R18(3.999,-2.499) R19(4.499,-2.499) T1(-4.501,-2.999) T2(-4.001,-2.999) T18(3.999,-2.999) T19(4.499,-2.999) U1(-4.501,-3.499) U2(-4.001,-3.499) U3(-3.501,-3.499) U17(3.499,-3.499) U18(3.999,-3.499) U19(4.499,-3.499) V1(-4.501,-3.999) V2(-4.001,-3.999) V3(-3.501,-3.999) V4(-3.001,-3.999) V5(-2.501,-3.999) V6(-2.001,-3.999) V7(-1.501,-3.999) V8(-1.001,-3.999) V9(-0.501,-3.999) V10(-0.001,-3.999) V11(0.499,-3.999) V12(0.999,-3.999) V13(1.499,-3.999) V14(1.999,-3.999) V15(2.499,-3.999) V16(2.999,-3.999) V17(3.499,-3.999) V18(3.999,-3.999) V19(4.499,-3.999) W1(-4.501,-4.499) W2(-4.001,-4.499) W3(-3.501,-4.499) W4(-3.001,-4.499) W5(-2.501,-4.499) W6(-2.001,-4.499) W7(-1.501,-4.499) W8(-1.001,-4.499) W9(-0.501,-4.499) W10(-0.001,-4.499) W11(0.499,-4.499) W12(0.999,-4.499) W13(1.499,-4.499) W14(1.999,-4.499) W15(2.499,-4.499) W16(2.999,-4.499) W17(3.499,-4.499) W18(3.999,-4.499) W19(4.499,-4.499)
  silkscreen extent -5.76,-5.17 5.18,5.17, body extent -5.01,-5.02 5.02,5.02, height 0.91
CAP_0603_TCS_M_ROM-L [mil]
  rect 30x24 smd paste+0 mask+0: 1(-26.5,0) 2(26.5,0)
  silkscreen extent -50,-24 5,24, body extent -36,-19 36,19, height 39
CAPC0402-01 [mm] "Chip Capacitor, Body 1.0x0.5mm, Height 0.6mm, IPC Medium Density"
  rect 0.62x0.62 smd: 1(-0.45,0) 2(0.45,0)
  silkscreen extent -0.51,-0.51 0.51,0.51, body extent -0.55,-0.3 0.55,0.3, height 0.6
CC0201_RF10 [mil] "SMD Multilayer Ceramic Inductor, body 0.60x0.30mm"
  rect 10x10 smd: 1(-11.81,0) 2(11.81,0)
  silkscreen extent 0,-5 0,5, body extent -12,-5 12,5, height 13
CON20_2X10_P100UM_HDR_TYC [mil]
  rect 60x60 hole 40 mask+0: 1(0,0)
  round 60 hole 40 mask+0: 2(0,100) 3(100,0) 4(100,100) 5(200,0) 6(200,100) 7(300,0) 8(300,100) 9(400,0) 10(400,100) 11(500,0) 12(500,100) 13(600,0) 14(600,100) 15(700,0) 16(700,100) 17(800,0) 18(800,100) 19(900,0) 20(900,100)
  silkscreen extent -55,-96 979,190, body extent -39,-53 961,147, height 400
CON30_2X15_P100UM_HDR_TYC [mil]
  rect 60x60 hole 40 mask+0: 1(0,0)
  round 60 hole 40 mask+0: 2(0,100) 3(100,0) 4(100,100) 5(200,0) 6(200,100) 7(300,0) 8(300,100) 9(400,0) 10(400,100) 11(500,0) 12(500,100) 13(600,0) 14(600,100) 15(700,0) 16(700,100) 17(800,0) 18(800,100) 19(900,0) 20(900,100) 21(1000,0) 22(1000,100) 23(1100,0) 24(1100,100) 25(1200,0) 26(1200,100) 27(1300,0) 28(1300,100) 29(1400,0) 30(1400,100)
  silkscreen extent -55,-96 1461,190, body extent -49,-51 1451,149, height 400
CON40_2X20_P100UM_HDR_TYC [mil]
  rect 60x60 hole 40 mask+0: 1(0,0)
  round 60 hole 40 mask+0: 2(0,100) 3(100,0) 4(100,100) 5(200,0) 6(200,100) 7(300,0) 8(300,100) 9(400,0) 10(400,100) 11(500,0) 12(500,100) 13(600,0) 14(600,100) 15(700,0) 16(700,100) 17(800,0) 18(800,100) 19(900,0) 20(900,100) 21(1000,0) 22(1000,100) 23(1100,0) 24(1100,100) 25(1200,0) 26(1200,100) 27(1300,0) 28(1300,100) 29(1400,0) 30(1400,100) 31(1500,0) 32(1500,100) 33(1600,0) 34(1600,100) 35(1700,0) 36(1700,100) 37(1800,0) 38(1800,100) 39(1900,0) 40(1900,100)
  silkscreen extent -55,-96 1955,190, body extent -40,-50 1960,150, height 374
CONN_77311-146-01LF_AMP_HDR_1X1_2.5MM_STRT_No3D [mil]
  rect 60x60 hole 38 mask+0: 1(0,0)
  silkscreen extent -55,-52 55,52
CONN_77311-146-02LF_AMP_HDR_1x2_2.5MM_STRT_no#D [mil]
  rect 60x60 hole 38 mask+0: 1(0,0)
  round 60 hole 40 mask+0: 2(-100,0)
  silkscreen extent -155,-67 70,52
CONN_CUI_SJ-3524-SMT-TR-XX_CUD [mil]
  rect 110x87 smd paste+0: 1(-145.7,191) 3(145.7,112.3)
  rect 110x110 smd: 2(-145.7,-179.1)
  rect 110x102 smd paste+0: 4(29.5,-336.5)
  round 67 / inner round 60 / far side round 67 hole 67 unplated paste-99999 mask-33.5: 5(0,147.7) 6(0,-127.9)
  silkscreen extent -232,-290 123,388, body extent -175,-364 179,384, height 201
CONN_FPC_BOT-ENT_FRONT-LOCK_0.50_8_reversed [mil] "HiRose FH52E-8S-0.5SH (Reversed Pin Order)"
  rect 12x34 smd paste+0 mask+4: 1(0,15) 2(-19.69,15) 3(-39.37,15) 4(-59.06,15) 5(-78.74,15) 6(-98.43,15) 7(-118.11,15) 8(-137.8,15)
  rect 79x130 smd: 9(-228,-134) 10(91,-134)
  silkscreen extent -281,-216 145,67, body extent -247,-207 111,19, height 79
CONN_FPC_BOT-ENT_FRONT-LOCK_0.50_20_reversed [mil] "HiRose HiRose FH52-20S-0.5SH Pin Order Reversed"
  rect 12x34 smd: 1(187.01,0) 2(167.32,0) 3(147.64,0) 4(127.95,0) 5(108.27,0) 6(88.58,0) 7(68.9,0) 8(49.21,0) 9(29.53,0) 10(9.84,0) 11(-9.84,0) 12(-29.53,0) 13(-49.21,0) 14(-68.9,0) 15(-88.58,0) 16(-108.27,0) 17(-127.95,0) 18(-147.64,0) 19(-167.32,0) 20(-187.01,0)
  rect 79x130 smd: 21(-277,-148) 22(275,-148)
  silkscreen extent -338,-228 340,49, body extent -280,-218 282,6, height 79
CONN_HDR_1X3_STRT_0.100_no3D [mm] ".025 SQ Post Terminal Strip Assembly, 1x3 Pins, Vertical, 2.54mm Pitch, Male"
  rect 1.55x1.55 hole 1.02: 1(0,0)
  round 1.55 hole 1.02: 2(2.54,0) 3(5.08,0)
  silkscreen extent -1.82,-1.71 6.54,1.27
CONN_HDR_1X4_STRT_0.100 [mil]
  rect 60x60 / inner round 60 / far side rect 60x60 hole 40 paste-99999 mask+0: 1(-150,0)
  round 60 hole 40 paste-99999 mask+0: 2(-50,0) 3(50,0) 4(150,0)
  silkscreen extent -215,-75 215,55, body extent -204,-48 202,52, height 330
CONN_SD_MOLEX_104031-0811 [mm]
  rect 0.85x1.1 smd: 1(3.105,-5.45) 2(2.005,-5.45) 3(0.905,-5.45) 4(-0.195,-5.45) 5(-1.295,-5.45) 6(-2.395,-5.45) 7(-3.495,-5.45)
  rect 0.75x1.1 smd: 8(-4.545,-5.45)
  rect 1.2x1 smd: 9(5.74,0.7) 10(5.74,4.4)
  rect 1.55x1.35 smd: G1(5.565,-5.325)
  rect 1.17x1.8 smd: G2(-5.755,-5.1)
  rect 1.9x1.35 smd: G3(-3.73,5.375) G4(2.24,5.375)
  silkscreen extent -6.58,-6.35 6.6,6.32, body extent -6,-5.72 5.95,5.69, height 1.4
CONN_U.FL_SWITCH_MURATA_MM8130-2600RA2 [mm]
  rect 0.75x0.8 smd paste-1 mask+0: G1(-1.025,0.95) G2(1.025,0.95) G3(-1.025,-0.95) G4(1.025,-0.95)
  rect 0.5x0.58 smd paste-1 mask+0: IN(0,1.16) OUT(0,-1.16)
  silkscreen extent -1.52,-1.57 1.55,1.91, body extent -1.25,-1.3 1.25,1.3, height 1.4
CONN_USB_C_GCT_USB4110GFA [mm] "GCT_USB4110GFA, 16 pin, 100% SMT, 2 guide holes"
  rect 0.6x1.15 smd: A1/B12(-3.2,1.075) A4/B9(-2.4,1.075) B1/A12(3.2,1.075) B4/A9(2.4,1.075)
  rect 0.3x1.15 smd: A5(-1.25,1.075) A6(-0.25,1.075) A7(0.25,1.075) A8(1.25,1.075) B5(1.75,1.075) B6(0.75,1.075) B7(-0.75,1.075) B8(-1.75,1.075)
  rect 2.18x2 smd: S1(-5.11,0.5) S2(5.11,0.5) S3(-5.11,-3.43) S4(5.11,-3.43)
  round 0.65 hole 0.65 unplated: ""(-2.89,0) ""(2.89,0)
  silkscreen extent -4.47,-6.28 4.47,2.33, body extent -5.65,-6.28 5.65,1.42, height 3.26
DFN8_2x3_SON8_DRB_TEX-M [mil]
  rrect50% 36x12 smd paste+0 mask+0: 1(-59,38.39) 2(-59,12.8) 3(-59,-12.8) 4(-59,-38.39) 5(59,-38.39) 6(59,-12.8) 7(59,12.8) 8(59,38.39)
  rect 69x98 smd paste-35 mask+0: 9(0,0)
  silkscreen extent -94,-66 66,66, body extent -59,-59 59,59, height 39
FB_0402_MuRata_as_R0402 [mil]
  rect 21.7x25.6 smd: 1(-16.7,0) 2(16.7,0)
  silkscreen extent -21,-18 19,18, body extent -20,-12 20,12, height 24
HDRV6W64P254_2X3_762X508X838P [mm]
  rect 1.65x1.65 hole 1.1: 1(0,0)
  round 1.65 hole 1.1: 2(0,2.54) 3(2.54,0) 4(2.54,2.54) 5(5.08,0) 6(5.08,2.54)
  silkscreen extent -1.27,-1.27 6.35,3.81, body extent -1.27,-1.32 6.35,3.76, height 8.38
Hole_#4 [mil]
  round 230 hole 125: 1(0,0)
IC_ICM-42670-P [mm]
  rect 0.475x0.25 smd mask+0: 1(-1.162,0.75) 2(-1.162,0.25) 3(-1.162,-0.25) 4(-1.162,-0.75) 8(1.162,-0.75) 9(1.162,-0.25) 10(1.162,0.25) 11(1.162,0.75)
  rect 0.25x0.475 smd mask+0: 5(-0.5,-0.913) 6(0,-0.913) 7(0.5,-0.913) 12(0.5,0.913) 13(0,0.913) 14(-0.5,0.913)
  Keep-Out Layer region: 0.9,-0.65 -0.9,-0.65 -0.9,0.65 0.9,0.65
  silkscreen extent -2.17,-1.25 1.5,1.25, body extent -1.5,-1.25 1.5,1.25, height 0.81
IND_0806_2016_SAM [mil]
  rect 42x71 smd paste+0 mask+0: 1(-36.5,0) 2(36.5,0)
  Top Layer keep-out region: -12,-33.5 -12,33.5 12,33.5 12,-33.5
  silkscreen extent -3,-40 3,40, body extent -44,-36 44,36, height 39
IND_IFSC_1515AH_VIS-M [mil]
  rect 87x160 smd paste+0: 1(-57.5,0) 2(57.5,0)
  silkscreen extent -112,-90 112,90, body extent -79,-79 79,79, height 71
IND_WE-KI_0402 [mm] "SMD Wire Wound Ceramic Inductor, body 1.00x0.55mm"
  rect 0.375x0.65 smd: 1(-0.413,0) 2(0.413,0)
  silkscreen extent -0.43,-0.48 0.41,0.48, body extent -0.51,-0.28 0.51,0.28, height 0.71
INDC2520X120N [mm]
  rect 1.24x2.22 smd paste+0: 1(-1.09,0) 2(1.09,0)
  silkscreen extent -1.93,-1.32 1.93,1.32, body extent -1.25,-1 1.25,1, height 1.2
LC0201_RF10 [mm] "SMD Multilayer Ceramic Inductor, body 0.60x0.30mm, 10mil wide pad"
  rect 0.3x0.254 smd: 1(-0.3,0) 2(0.3,0)
  silkscreen extent 0,-0.13 0,0.13, body extent -0.3,-0.13 0.3,0.13, height 0.33
LED_0603-GRN_AK [mm] "SMT LED 0603 Green"
  rect 0.8x0.8 smd: A(-0.75,0) K(0.75,0)
  silkscreen extent -0.7,-0.6 0.97,0.71, body extent -0.8,-0.4 0.8,0.4, height 0.8
LED_SML-LX0404_LUM [mil]
  rect 18x18 smd paste+0: 1(-16.73,16.73) 2(16.73,16.73) 3(16.73,-16.73) 4(-16.73,-16.73)
  silkscreen extent -43,-32 32,32, body extent -19,-19 19,19, height 15